# Altium PCB boardv1.PcbDoc
Units mil, origin at the board's own origin, x right, y up, seen from the top; angles counter-clockwise.
Board outline 3346.46 x 3346.46 mil, 4 copper layers (Top Layer, Mid-Layer 1, Mid-Layer 2, Bottom Layer); 186 components, 96 nets, 691 pads, 110 vias.
Unrouted connection lines stored in the file: 478.
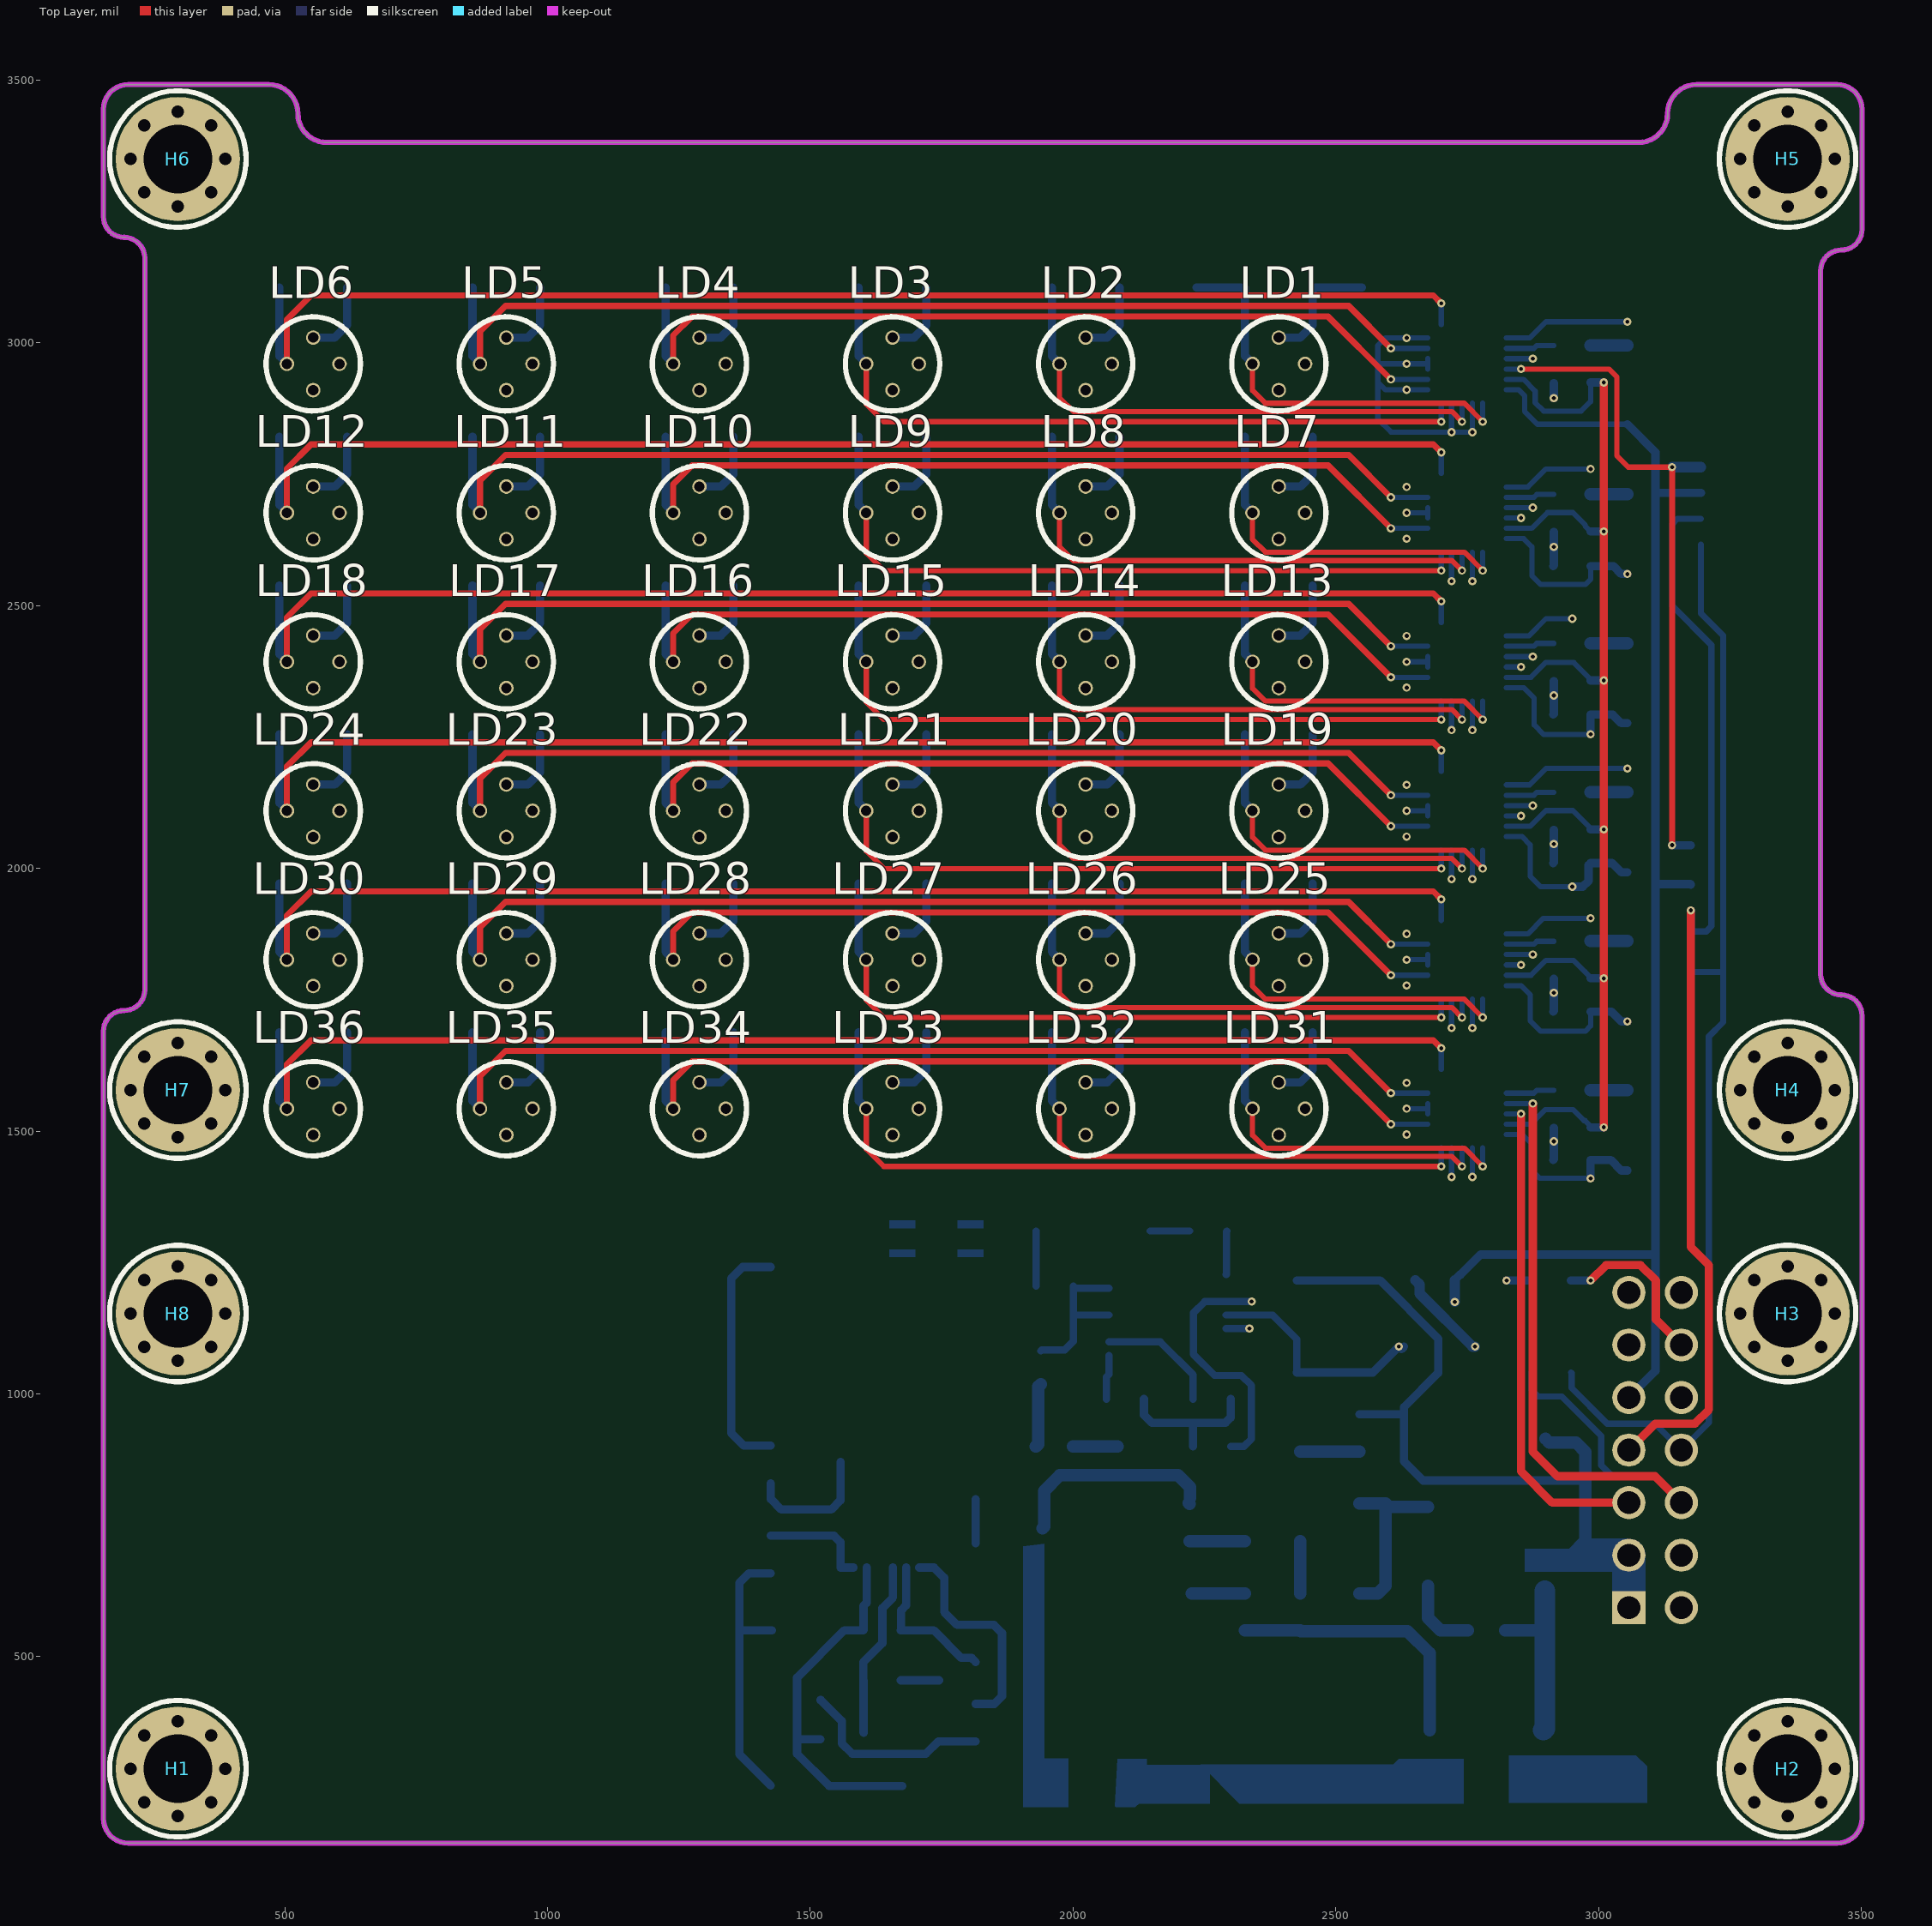
[diagram p0: Top Layer view]
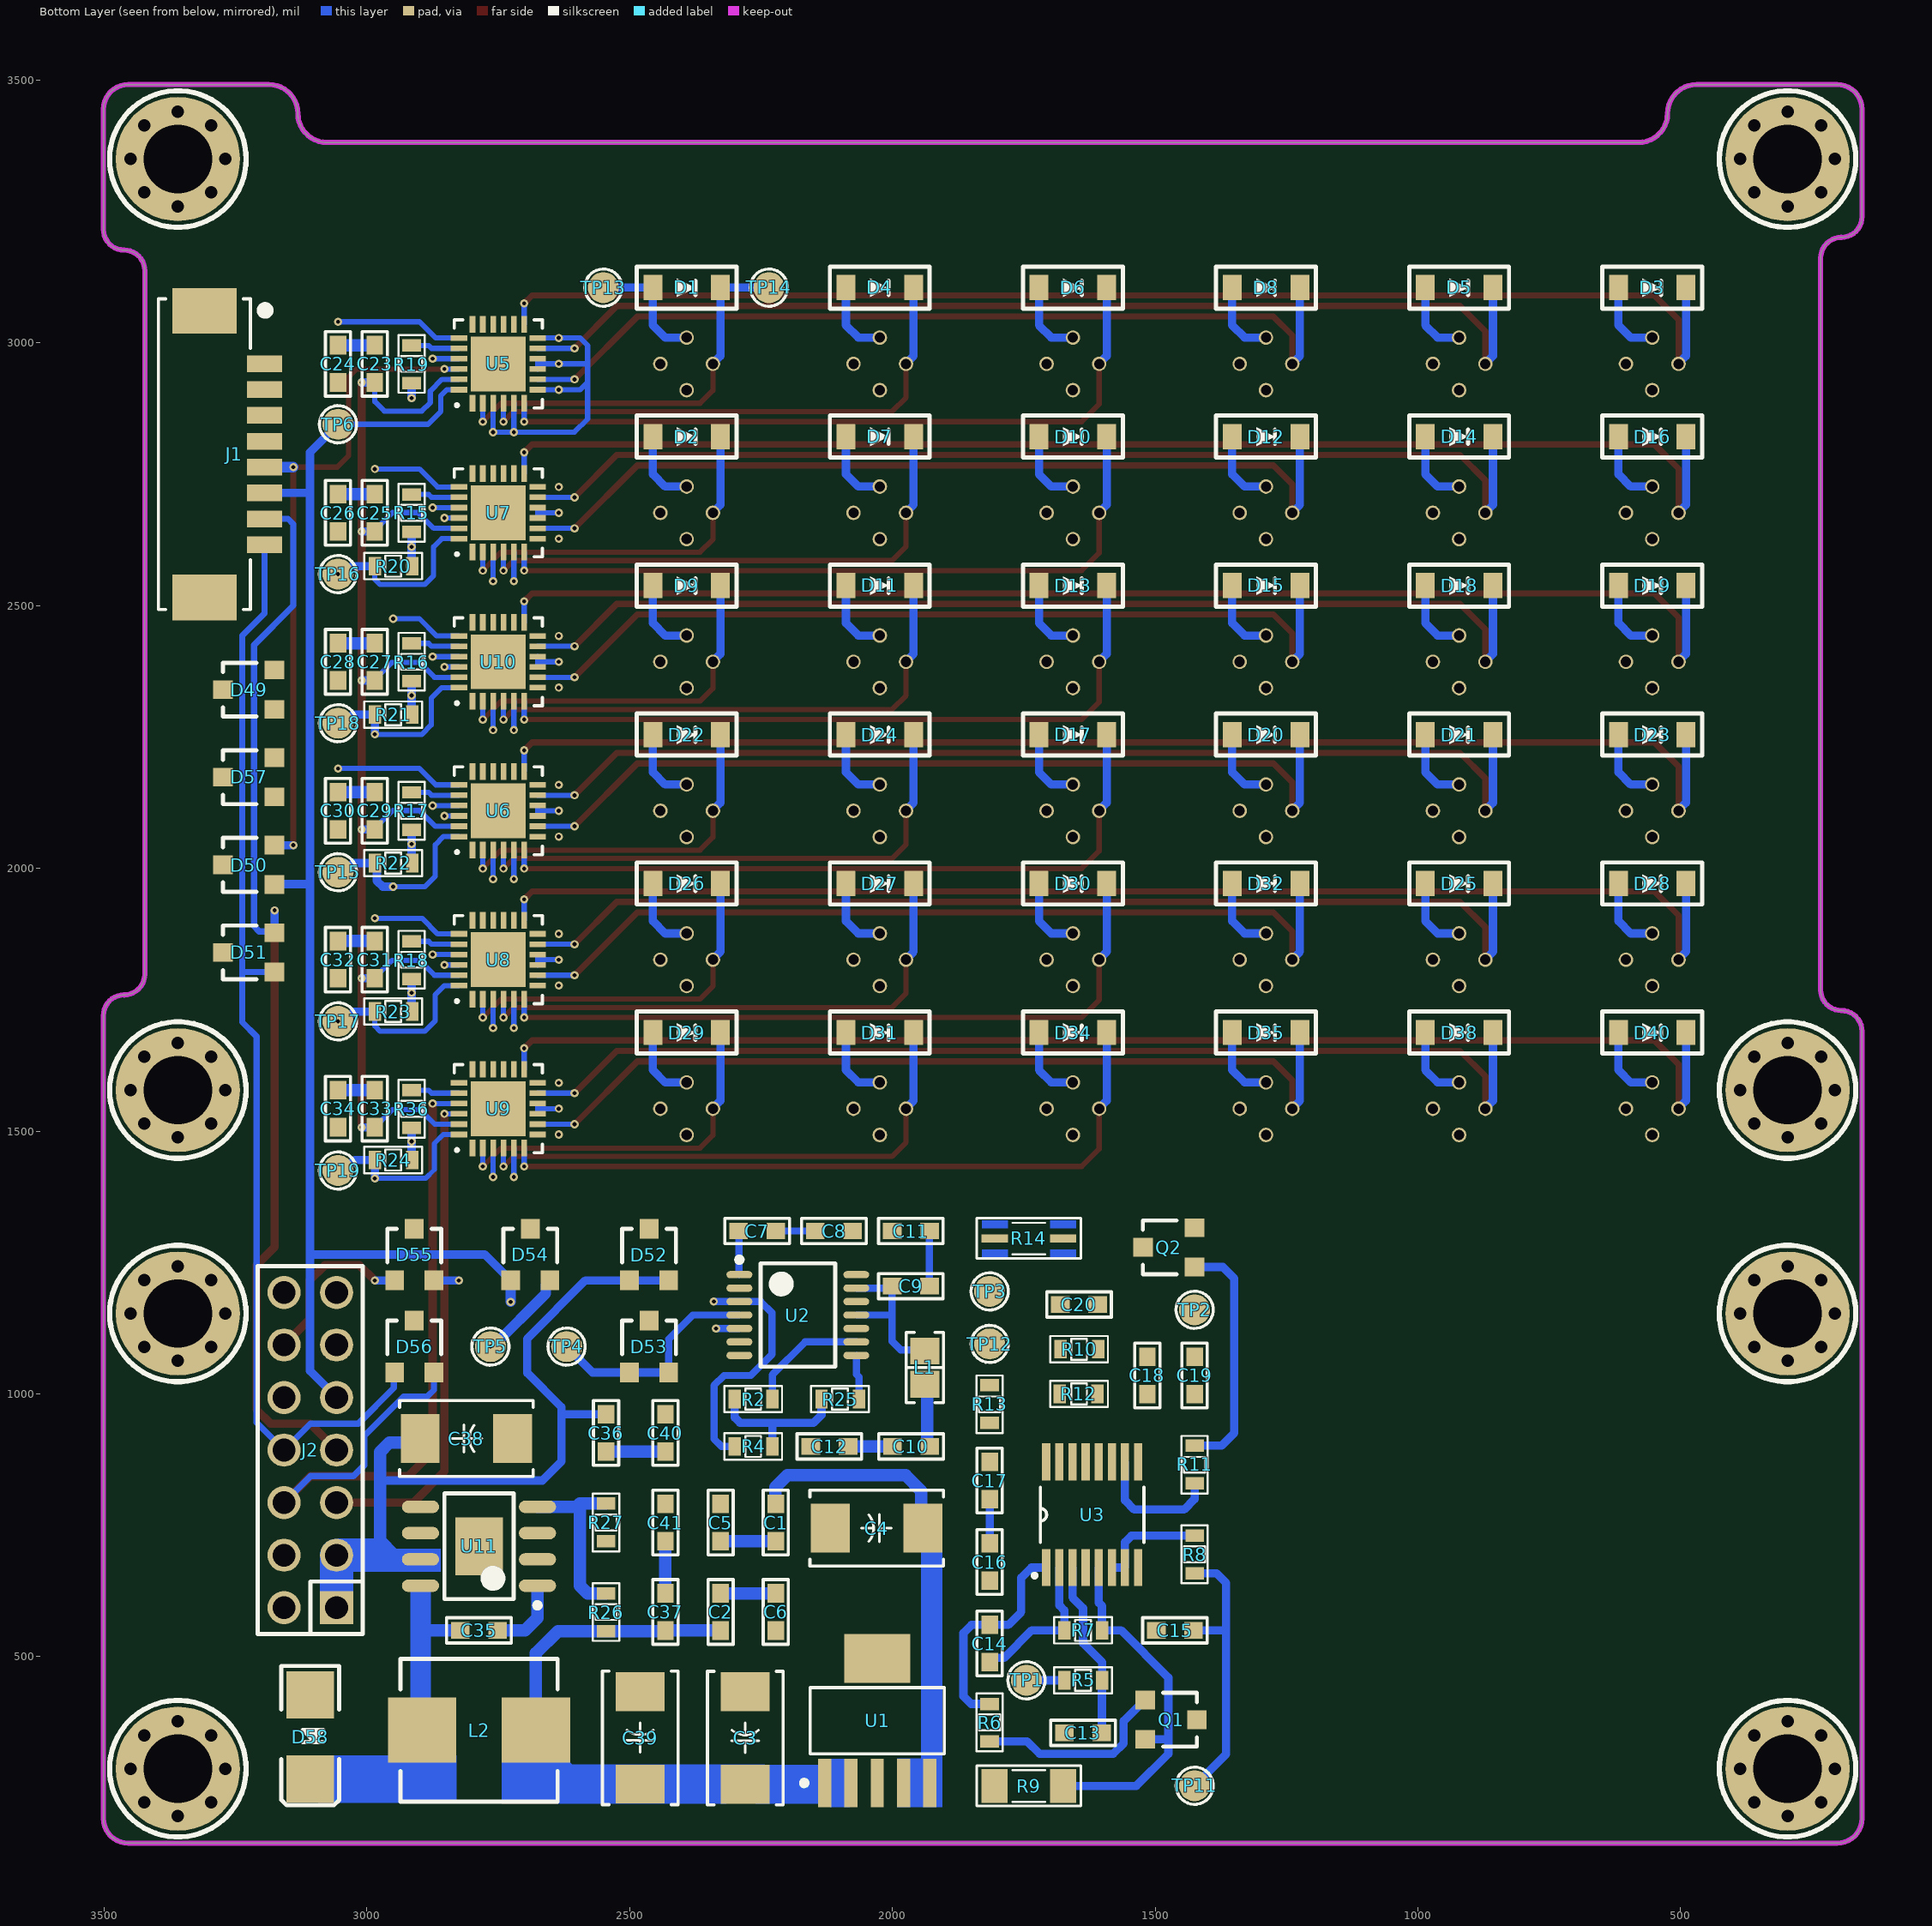
[diagram p1: Bottom Layer view, seen from below]
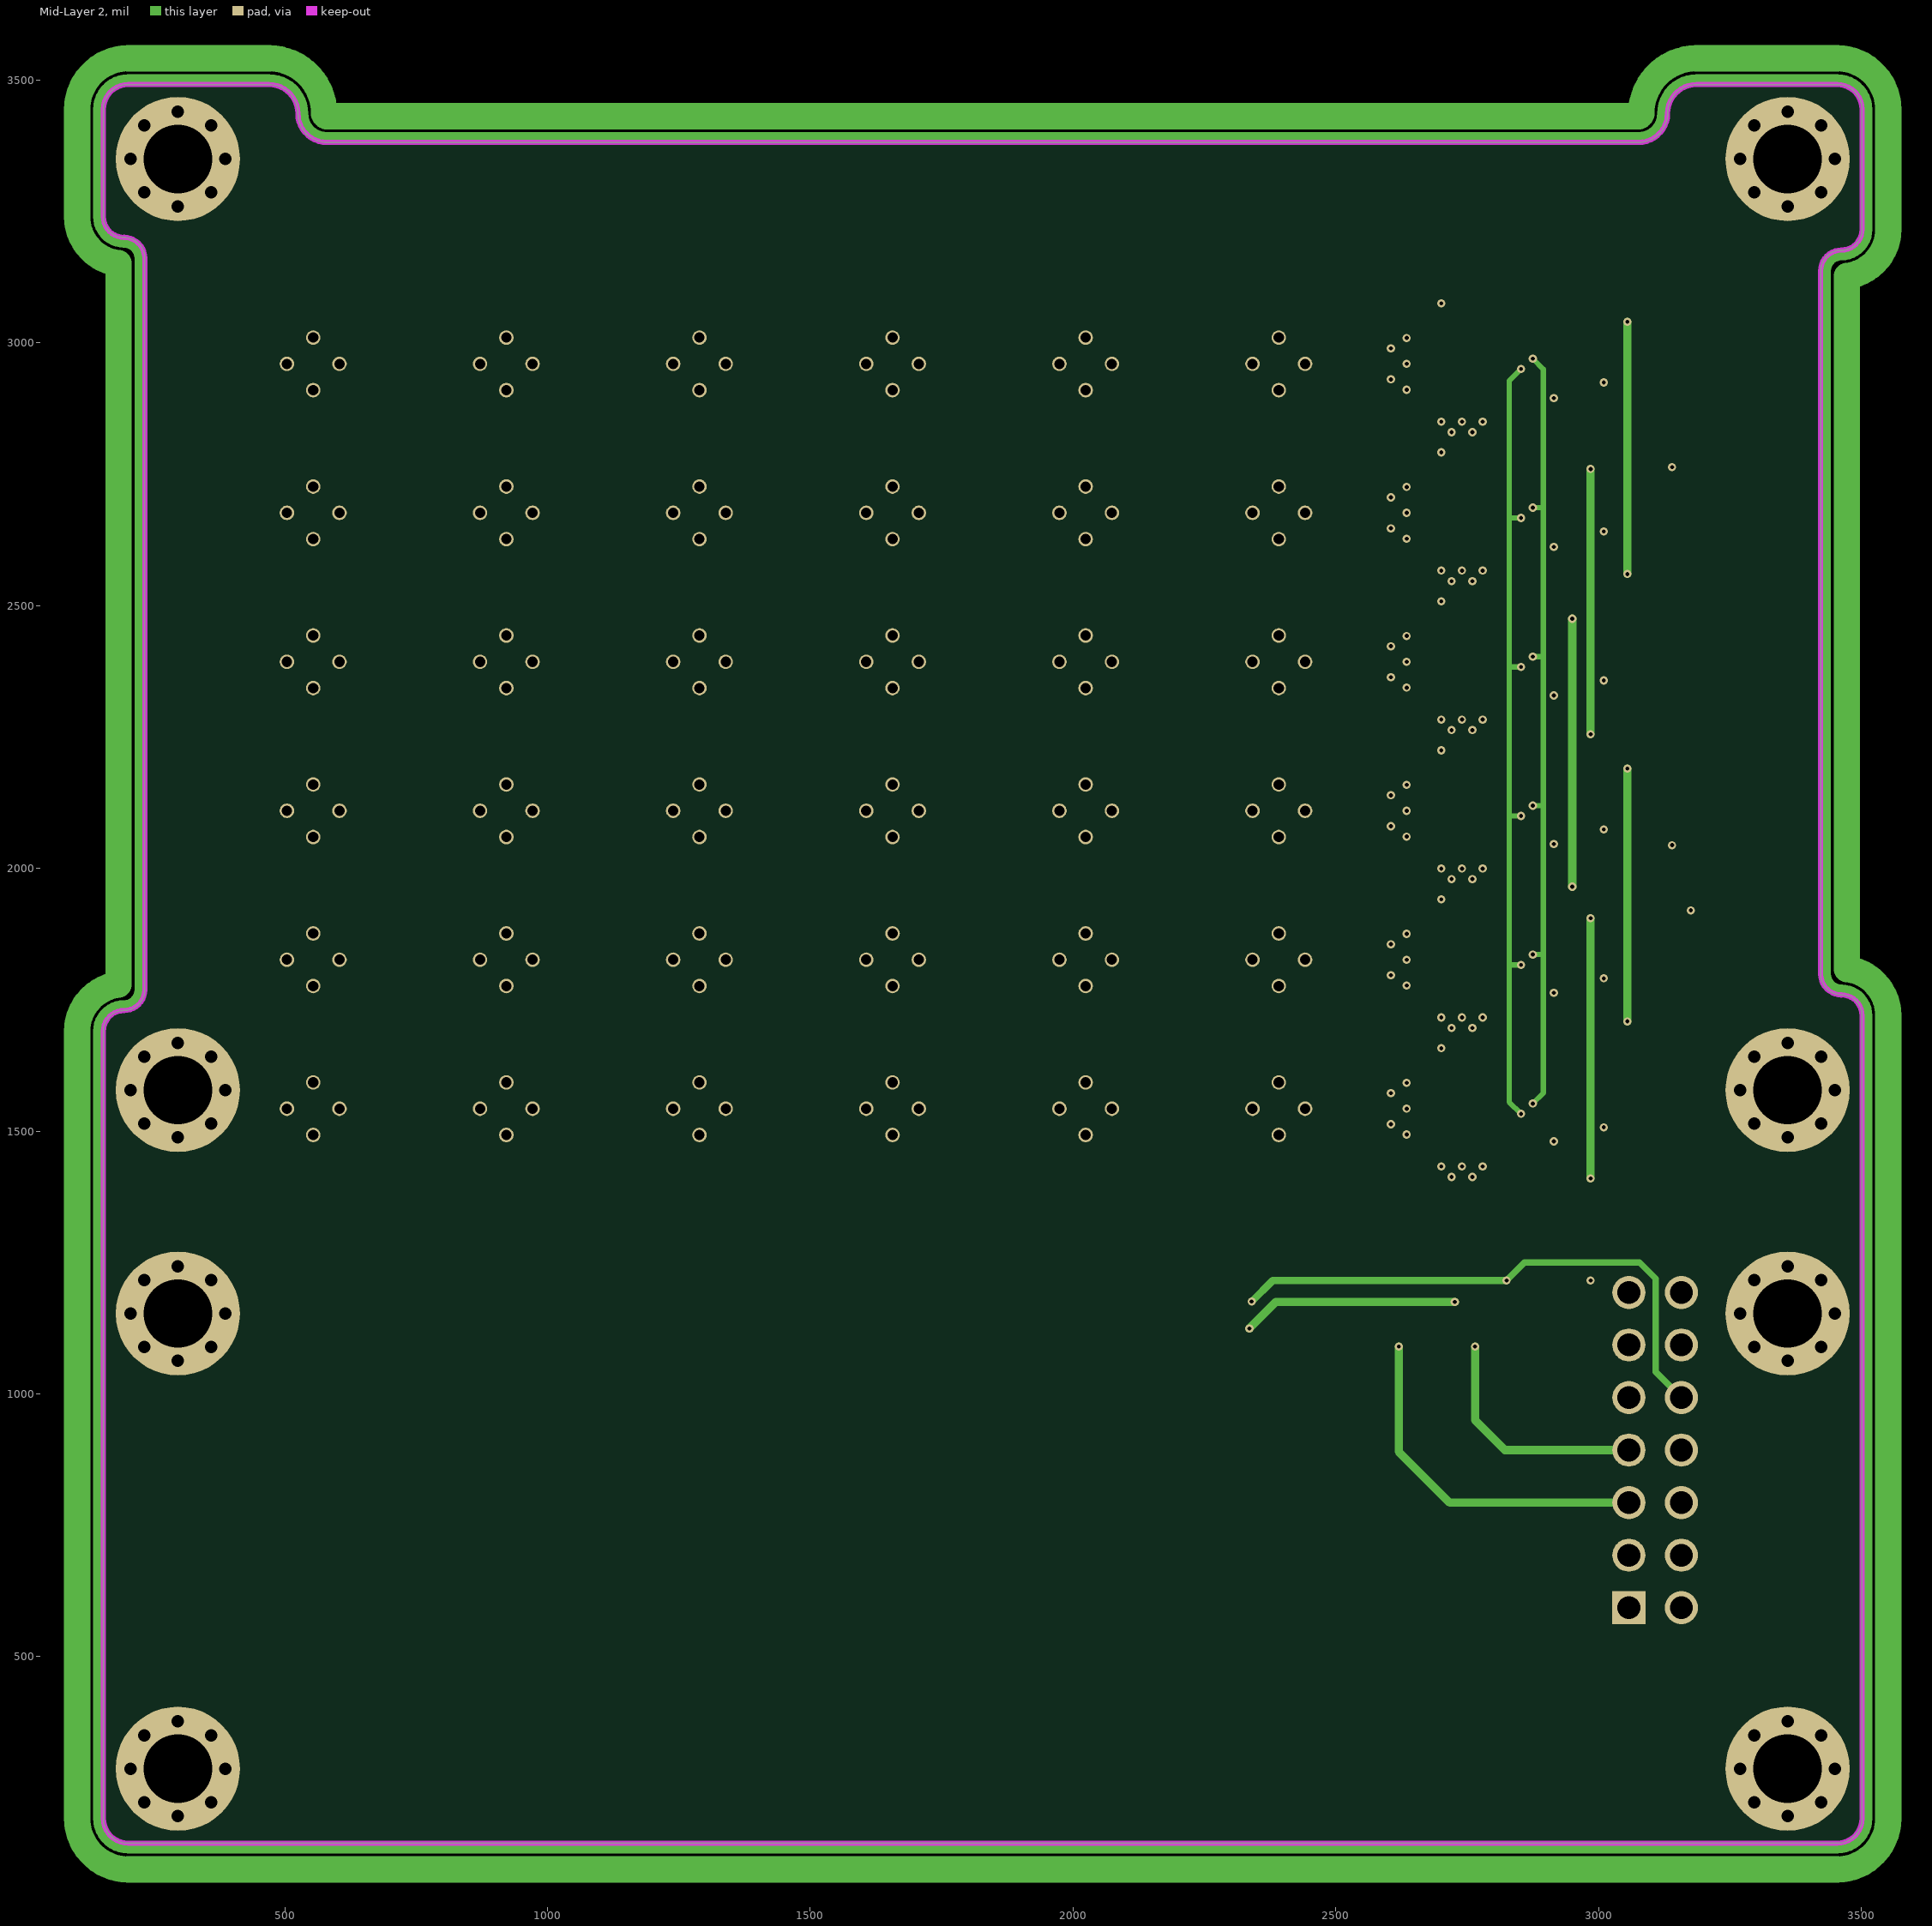
[diagram p2: Mid-Layer 2]

## Layer stack, top to bottom
Top Solder: solder mask 0.4, Solder Resist, Dk 3.5
Top Layer: signal copper 1.4
Dielectric 1: dielectric 12.6, FR-4, Dk 4.8
Mid-Layer 1: signal copper 1.4
Dielectric2: dielectric 12.6, FR-4, Dk 4.8
Mid-Layer 2: signal copper 1.4
Dielectric3: dielectric 12.6, FR-4, Dk 4.8
Bottom Layer: signal copper 1.4
Bottom Solder: solder mask 0.4, Solder Resist, Dk 3.5

## Board outline
202.24,145 cw(c202.24,192.24) 155,192.24 155,1690 cw(c194.37,1690) 194.37,1729.37 ccw(c194.37,1768.74) 233.74,1768.74 233.74,3161.26 ccw(c194.37,3161.26) 194.37,3200.63 cw(c194.37,3240) 155,3240 155,3444.21 cw(c202.24,3444.21) 202.24,3491.46 469.96,3491.46 cw(c469.96,3436.34) 525.08,3436.34 ccw(c580.2,3436.34) 580.2,3381.22 3076.26,3381.22 ccw(c3076.26,3436.34) 3131.38,3436.34 cw(c3186.5,3436.34) 3186.5,3491.46 3454.21,3491.46 cw(c3454.21,3444.21) 3501.46,3444.21 3501.46,3215.87 cw(c3462.09,3215.87) 3462.09,3176.5 ccw(c3462.09,3137.13) 3422.72,3137.13 3422.72,1798.54 ccw(c3462.09,1798.54) 3462.09,1759.17 cw(c3462.09,1719.8) 3501.46,1719.8 3501.46,192.24 cw(c3454.21,192.24) 3454.21,145

## Design rules (kind name [scope] priority, off if disabled: settings)
Clearance [All] p1: gap=0 ignorepadtopadclearanceinfootprint=FALSE
PolygonConnect [All] p1: connectstyle=Direct reliefconductorwidth=10 reliefentries=4 polygonreliefangle="90 Angle" airgapwidth=10
RoutingVias [All] p1: holewidth=28 width=50 viastyle="Through Hole" minholewidth=28 minwidth=50 maxholewidth=28 maxwidth=50
SolderMaskExpansion [All] p1: expansion=4 istentingtop=FALSE
Width [All] p1: maxlimit=118.11 minlimit=10 preferedwidth=23.62 minimp=50.000000 maximp=50.000000 favimp=50.000000
30 further rules are at their usual default settings.

## Classes and differential pairs
component class SWITCHING: C23 C24 C25 C26 C27 C28 C29 C30 C31 C32 C33 C34 D1 D2 D3 D4 D5 D6 D7 D8 D9 D10 D11 D12 D13 D14 D15 D16 D17 D18 D19 D20 D21 D22 D23 D24 D25 D26 D27 D28 D29 D30 D31 D32 D34 D35 D38 D40 LD1 LD2 LD3 LD4 LD5 LD6 LD7 LD8 LD9 LD10 LD11 LD12 LD13 LD14 LD15 LD16 LD17 LD18 LD19 LD20 LD21 LD22 LD23 LD24 LD25 LD26 LD27 LD28 LD29 LD30 LD31 LD32 LD33 LD34 LD35 LD36 R15 R16 R17 R18 R19 R20 R21 R22 R23 R24 R36 t TP13 TP14 TP15 TP16 TP17 TP18 TP19 U5 U6 U7 U8 U9 U10
component class CURRENT_SOURCE: C13 C14 C15 C16 C17 C18 C19 C20 Q1 Q2 R5 R6 R7 R8 R9 R10 R11 R12 R13 R14 TP11 TP12 U3
component class "POWER SWITCH AND LDO": C1 C2 C3 C4 C5 C6 C35 C36 C37 C38 C39 C40 C41 D58 L2 R26 R27 U1 U11
component class COMMUNICATION: C7 C8 C9 C10 C11 C12 D49 D50 D51 D52 D53 D54 D55 D56 D57 H1 H2 H3 H4 H5 H6 H7 H8 J1 J2 L1 R2 R4 R25 TP1 TP2 TP3 TP4 TP5 TP6 U2

## Components (designator, comment, footprint, x,y, rotation, side; value= is the part's Value field where it differs from the comment)
C1 "0.22uF/25V" SM-0603 2222,755 r90 bottom value=103
C2 "0.22uF/25V" SM-0603 2327,585 r270 bottom value=103
C3 "100uF/16V" "CAP TANT 2312" 2280,345 r90 bottom
C4 "100uF/16V" "CAP TANT 2312" 2030,744.5 r0 bottom
C5 "0.22uF/25V" SM-0603 2327,755 r270 bottom value=103
C6 "0.22uF/25V" SM-0603 2222,585 r90 bottom value=103
C7 "0.22uF/25V" SM-0603 2257.47,1309.91 r0 bottom value=103
C8 "0.22uF/25V" SM-0603 2111.24,1309.91 r0 bottom value=103
C9 "0.22uF/25V" SM-0603 1965,1205 r0 bottom value=103
C10 "0.22uF/25V" SM-0603 1964.57,900 r180 bottom value=103
C11 "0.22uF/25V" SM-0603 1965,1309.91 r180 bottom value=103
C12 "0.22uF/25V" SM-0603 2120,900 r180 bottom value=103
C13 "470pF/50V" SM-0603 1637.47,355 r180 bottom value=103
C14 "0.22uF/25V" SM-0603 1815,525 r90 bottom value=103
C15 "470pF/50V" SM-0603 1462.53,550 r180 bottom value=103
C16 "0.22uF/25V" SM-0603 1815,680 r270 bottom value=103
C17 "0.22uF/25V" SM-0603 1815,835 r270 bottom value=103
C18 "470pF/50V" SM-0603 1515,1035 r90 bottom value=103
C19 "0.22uF/25V" SM-0603 1425,1035 r270 bottom value=103
C20 "470pF/50V" SM-0603 1645,1170 r0 bottom value=103
C23 "0.22uF/25V" SM-0603 2985,2959.96 r270 bottom value=103
C24 "0.22uF/25V" SM-0603 3055,2959.96 r90 bottom value=103
C25 "0.22uF/25V" SM-0603 2985,2676.5 r270 bottom value=103
C26 "0.22uF/25V" SM-0603 3055,2676.5 r90 bottom value=103
C27 "0.22uF/25V" SM-0603 2985,2393.03 r270 bottom value=103
C28 "0.22uF/25V" SM-0603 3055,2393.03 r90 bottom value=103
C29 "0.22uF/25V" SM-0603 2985,2109.57 r270 bottom value=103
C30 "0.22uF/25V" SM-0603 3055,2109.57 r90 bottom value=103
C31 "0.22uF/25V" SM-0603 2985,1826.1 r270 bottom value=103
C32 "0.22uF/25V" SM-0603 3055,1826.1 r90 bottom value=103
C33 "0.22uF/25V" SM-0603 2985,1542.64 r270 bottom value=103
C34 "0.22uF/25V" SM-0603 3055,1542.64 r90 bottom value=103
C35 "0.01uF/25V" SM-0603 2786.73,550 r180 bottom value=103
C36 "0.22uF/25V" SM-0603 2545,925.5 r90 bottom value=103
C37 "0.22uF/25V" SM-0603 2432,585 r270 bottom value=103
C38 "100uF/16V" "CAP TANT 2312" 2810.72,915 r180 bottom
C39 "100uF/16V" "CAP TANT 2312" 2480,345.35 r90 bottom
C40 "0.22uF/25V" SM-0603 2432,925.5 r270 bottom value=103
C41 "0.22uF/25V" SM-0603 2432,755 r270 bottom value=103
D1 "1N4148W-TP" SOD23 2456.61,3105 r180 bottom value=1N5007
D2 "1N4148W-TP" SOD23 2456.61,2821.54 r180 bottom value=1N5007
D3 "1N4148W-TP" SOD23 619.21,3105 r180 bottom value=1N5007
D4 "1N4148W-TP" SOD23 2089.13,3105 r180 bottom value=1N5007
D5 "1N4148W-TP" SOD23 986.69,3105 r180 bottom value=1N5007
D6 "1N4148W-TP" SOD23 1721.65,3105 r180 bottom value=1N5007
D7 "1N4148W-TP" SOD23 2089.13,2821.54 r180 bottom value=1N5007
D8 "1N4148W-TP" SOD23 1354.17,3105 r180 bottom value=1N5007
D9 "1N4148W-TP" SOD23 2456.61,2538.07 r180 bottom value=1N5007
D10 "1N4148W-TP" SOD23 1721.65,2821.54 r180 bottom value=1N5007
D11 "1N4148W-TP" SOD23 2089.13,2538.07 r180 bottom value=1N5007
D12 "1N4148W-TP" SOD23 1354.17,2821.54 r180 bottom value=1N5007
D13 "1N4148W-TP" SOD23 1721.65,2538.07 r180 bottom value=1N5007
D14 "1N4148W-TP" SOD23 986.69,2821.54 r180 bottom value=1N5007
D15 "1N4148W-TP" SOD23 1354.17,2538.07 r180 bottom value=1N5007
D16 "1N4148W-TP" SOD23 619.21,2821.54 r180 bottom value=1N5007
D17 "1N4148W-TP" SOD23 1721.65,2254.61 r180 bottom value=1N5007
D18 "1N4148W-TP" SOD23 986.69,2538.07 r180 bottom value=1N5007
D19 "1N4148W-TP" SOD23 619.21,2538.07 r180 bottom value=1N5007
D20 "1N4148W-TP" SOD23 1354.17,2254.61 r180 bottom value=1N5007
D21 "1N4148W-TP" SOD23 986.69,2254.61 r180 bottom value=1N5007
D22 "1N4148W-TP" SOD23 2456.61,2254.61 r180 bottom value=1N5007
D23 "1N4148W-TP" SOD23 619.21,2254.61 r180 bottom value=1N5007
D24 "1N4148W-TP" SOD23 2089.13,2254.61 r180 bottom value=1N5007
D25 "1N4148W-TP" SOD23 986.69,1971.14 r180 bottom value=1N5007
D26 "1N4148W-TP" SOD23 2456.61,1971.14 r180 bottom value=1N5007
D27 "1N4148W-TP" SOD23 2089.13,1971.14 r180 bottom value=1N5007
D28 "1N4148W-TP" SOD23 619.21,1971.14 r180 bottom value=1N5007
D29 "1N4148W-TP" SOD23 2456.61,1687.68 r180 bottom value=1N5007
D30 "1N4148W-TP" SOD23 1721.65,1971.14 r180 bottom value=1N5007
D31 "1N4148W-TP" SOD23 2089.13,1687.68 r180 bottom value=1N5007
D32 "1N4148W-TP" SOD23 1354.17,1971.14 r180 bottom value=1N5007
D34 "1N4148W-TP" SOD23 1721.65,1687.68 r180 bottom value=1N5007
D35 "1N4148W-TP" SOD23 1354.17,1687.68 r180 bottom value=1N5007
D38 "1N4148W-TP" SOD23 986.69,1687.68 r180 bottom value=1N5007
D40 "1N4148W-TP" SOD23 619.21,1687.68 r180 bottom value=1N5007
D49 "S2312" SOT23-123 3225,2340 r90 bottom
D50 "S2303" SOT23-123 3225,2006.67 r90 bottom
D51 "S2303" SOT23-123 3225,1840 r90 bottom
D52 "S2312" SOT23-123 2463.11,1265 r180 bottom
D53 "S2303" SOT23-123 2463.11,1090 r180 bottom
D54 "S2303" SOT23-123 2689.06,1265 r180 bottom
D55 "S2303" SOT23-123 2910,1265 r180 bottom
D56 "S2303" SOT23-123 2910,1090 r180 bottom
D57 "S2303" SOT23-123 3225,2173.33 r90 bottom
D58 "SS54" DIO-SMD-A 3102.76,352.28 r90 bottom value=1N5007
H1 "HOLD" M3 296.73,286.73 r0 top locked
H2 "HOLD" M3 3359.72,286.73 r0 top locked
H3 "HOLD" M3 3359.72,1152.87 r0 top locked
H4 "HOLD" M3 3359.72,1578.07 r0 top locked
H5 "HOLD" M3 3359.72,3349.72 r0 top locked
H6 "HOLD" M3 296.73,3349.72 r0 top locked
H7 "HOLD" M3 296.73,1578.07 r0 top locked
H8 "HOLD" M3 296.73,1152.87 r0 top locked
J1 "LASER EXT" 0532610871 3309.35,2788.03 r90 bottom
J2 "JP7x2" JP7-D2T 3107.76,893.03 r90 bottom
L1 "10uH" "FER 0805/2012" 1938.45,1050 r270 bottom value=1.5uH
L2 "15uH/3.5A" SRP7050TA 2786.73,360 r180 bottom
LD1 "LaserDiode" LASER_SOCKET 2391.61,2959.96 r0 top
LD2 "LaserDiode" LASER_SOCKET 2024.13,2959.96 r0 top
LD3 "LaserDiode" LASER_SOCKET 1656.65,2959.96 r0 top
LD4 "LaserDiode" LASER_SOCKET 1289.17,2959.96 r0 top
LD5 "LaserDiode" LASER_SOCKET 921.69,2959.96 r0 top
LD6 "LaserDiode" LASER_SOCKET 554.21,2959.96 r0 top
LD7 "LaserDiode" LASER_SOCKET 2391.61,2676.5 r0 top
LD8 "LaserDiode" LASER_SOCKET 2024.13,2676.5 r0 top
LD9 "LaserDiode" LASER_SOCKET 1656.65,2676.5 r0 top
LD10 "LaserDiode" LASER_SOCKET 1289.17,2676.5 r0 top
LD11 "LaserDiode" LASER_SOCKET 921.69,2676.5 r0 top
LD12 "LaserDiode" LASER_SOCKET 554.21,2676.5 r0 top
LD13 "LaserDiode" LASER_SOCKET 2391.61,2393.03 r0 top
LD14 "LaserDiode" LASER_SOCKET 2024.13,2393.03 r0 top
LD15 "LaserDiode" LASER_SOCKET 1656.65,2393.03 r0 top
LD16 "LaserDiode" LASER_SOCKET 1289.17,2393.03 r0 top
LD17 "LaserDiode" LASER_SOCKET 921.69,2393.03 r0 top
LD18 "LaserDiode" LASER_SOCKET 554.21,2393.03 r0 top
LD19 "LaserDiode" LASER_SOCKET 2391.61,2109.57 r0 top
LD20 "LaserDiode" LASER_SOCKET 2024.13,2109.57 r0 top
LD21 "LaserDiode" LASER_SOCKET 1656.65,2109.57 r0 top
LD22 "LaserDiode" LASER_SOCKET 1289.17,2109.57 r0 top
LD23 "LaserDiode" LASER_SOCKET 921.69,2109.57 r0 top
LD24 "LaserDiode" LASER_SOCKET 554.21,2109.57 r0 top
LD25 "LaserDiode" LASER_SOCKET 2391.61,1826.1 r0 top
LD26 "LaserDiode" LASER_SOCKET 2024.13,1826.1 r0 top
LD27 "LaserDiode" LASER_SOCKET 1656.65,1826.1 r0 top
LD28 "LaserDiode" LASER_SOCKET 1289.17,1826.1 r0 top
LD29 "LaserDiode" LASER_SOCKET 921.69,1826.1 r0 top
LD30 "LaserDiode" LASER_SOCKET 554.21,1826.1 r0 top
LD31 "LaserDiode" LASER_SOCKET 2391.61,1542.64 r0 top
LD32 "LaserDiode" LASER_SOCKET 2024.13,1542.64 r0 top
LD33 "LaserDiode" LASER_SOCKET 1656.65,1542.64 r0 top
LD34 "LaserDiode" LASER_SOCKET 1289.17,1542.64 r0 top
LD35 "LaserDiode" LASER_SOCKET 921.69,1542.64 r0 top
LD36 "LaserDiode" LASER_SOCKET 554.21,1542.64 r0 top
Q1 "AO3400" SOT23-132 1469.94,380 r270 bottom
Q2 "AO3400" SOT23-132 1474.21,1278.8 r90 bottom
R2 "4.7K 1%" RES-SMD-0603 2265,990 r180 bottom
R4 "4.7K 1%" RES-SMD-0603 2265,900 r180 bottom
R5 "50R 1%" RES-SMD-0603 1637.47,455 r180 bottom
R6 "100R 1%" RES-SMD-0603 1815.03,375 r270 bottom
R7 "1K 1%" RES-SMD-0603 1637.47,550 r180 bottom
R8 "50R 1%" RES-SMD-0603 1425,695 r270 bottom
R9 "250R 1%" RES-SMD-1206#1 1740.5,253.84 r180 bottom
R10 "50R 1%" RES-SMD-0603 1645,1085 r180 bottom
R11 "100R 1%" RES-SMD-0603 1425,865 r90 bottom
R12 "1K 1%" RES-SMD-0603 1645.01,1000 r0 bottom
R13 "50R 1%" RES-SMD-0603 1815,980 r90 bottom
R14 "250R 1%" RES-SMD-1206#2 1740.47,1295.41 r180 bottom
R15 "4.7K 1%" RES-SMD-0603 2915,2676.5 r270 bottom
R16 "4.7K 1%" RES-SMD-0603 2915,2393.03 r270 bottom
R17 "4.7K 1%" RES-SMD-0603 2915,2109.57 r270 bottom
R18 "4.7K 1%" RES-SMD-0603 2915,1826.11 r270 bottom
R19 "4.7K 1%" RES-SMD-0603 2915,2959.96 r270 bottom
R20 "4.7K 1%" RES-SMD-0603 2950,2575 r180 bottom
R21 "4.7K 1%" RES-SMD-0603 2950,2292.5 r180 bottom
R22 "4.7K 1%" RES-SMD-0603 2950,2010 r180 bottom
R23 "4.7K 1%" RES-SMD-0603 2950,1727.5 r180 bottom
R24 "4.7K 1%" RES-SMD-0603 2950,1445 r180 bottom
R25 "4.7K 1%" RES-SMD-0603 2100,990 r180 bottom
R26 "10K 1%" RES-SMD-0603 2545,585 r270 bottom
R27 "3.24K 0.1%" RES-SMD-0603 2545,755 r90 bottom
R36 "4.7K 1%" RES-SMD-0603 2915,1542.64 r270 bottom
TP1 "Test_Point" TESTPOINT 1745,455 r180 bottom
TP2 "Test_Point" TESTPOINT 1425,1160 r90 bottom
TP3 "Test_Point" TESTPOINT 1815,1195 r90 bottom
TP4 "Test_Point" TESTPOINT 2620,1090 r90 bottom
TP5 "Test_Point" TESTPOINT 2765,1090 r90 bottom
TP6 "Test_Point" TESTPOINT 3055,2845 r90 bottom
TP11 "Test_Point" TESTPOINT 1425,254.35 r0 bottom
TP12 "Test_Point" TESTPOINT 1815,1095 r90 bottom
TP13 "Test_Point" TESTPOINT 2550,3105 r90 bottom
TP14 "Test_Point" TESTPOINT 2235,3105 r90 bottom
TP15 "Test_Point" TESTPOINT 3055,1992.5 r90 bottom
TP16 "Test_Point" TESTPOINT 3055,2560 r90 bottom
TP17 "Test_Point" TESTPOINT 3055,1708.75 r90 bottom
TP18 "Test_Point" TESTPOINT 3055,2276.25 r180 bottom
TP19 "Test_Point" TESTPOINT 3055,1425 r180 bottom
U1 "TPS7A4533DCQR" SOT223-6 2028.91,378.04 r90 bottom
U2 "MCP4902-E/ST" TSSOP14 2180,1150 r180 bottom
U3 "OPA4340" SSOP16 1620,770 r90 bottom
U5 "ADG1414BCPZ" ADG1414BCPZ 2750,2959.96 r90 bottom
U6 "ADG1414BCPZ" ADG1414BCPZ 2750,2109.57 r90 bottom
U7 "ADG1414BCPZ" ADG1414BCPZ 2750,2676.5 r90 bottom
U8 "ADG1414BCPZ" ADG1414BCPZ 2750,1826.1 r90 bottom
U9 "ADG1414BCPZ" ADG1414BCPZ 2750,1542.64 r90 bottom
U10 "ADG1414BCPZ" ADG1414BCPZ 2750,2393.03 r90 bottom
U11 "TPS5430DDAR" HSOP8 2786.73,710 r0 bottom

## Footprints (in the part's own frame and the unit in brackets; to place one, negate y for a bottom-side part, rotate by r counter-clockwise, add the part's x,y. Pads: shape width x height; smd on the part's side, far side on the other; paste and mask are expansions set on the pad)
0532610871 [mil] "CONN HEADER SMD R/A 8POS 1.25MM"
  rect 32x67 smd paste+0 mask+0: 1(172.24,-114.35) 2(123.03,-114.35) 3(73.82,-114.35) 4(24.61,-114.35) 5(-24.61,-114.35) 6(-73.82,-114.35) 7(-123.03,-114.35) 8(-172.24,-114.35)
  rect 87x122 smd paste-61 mask-61: 9(-272.64,-0.18) 10(272.64,-0.18)
  silkscreen extent -296,-122 296,88, body extent -299,-123 298,81, height 134
ADG1414BCPZ [mm] "IC SW SPST-NOX8 11.5OHM 24LFCSP"
  rect 0.805x0.275 smd paste+0 mask+0: 1(-1.902,1.25) 2(-1.902,0.75) 3(-1.902,0.25) 4(-1.902,-0.25) 5(-1.902,-0.75) 6(-1.902,-1.25) 13(1.902,-1.25) 14(1.902,-0.75) 15(1.902,-0.25) 16(1.902,0.25) 17(1.902,0.75) 18(1.902,1.25)
  rect 0.275x0.805 smd paste+0 mask+0: 7(-1.25,-1.902) 8(-0.75,-1.902) 9(-0.25,-1.902) 10(0.25,-1.902) 11(0.75,-1.902) 12(1.25,-1.902) 19(1.25,1.902) 20(0.75,1.902) 21(0.25,1.902) 22(-0.25,1.902) 23(-0.75,1.902) 24(-1.25,1.902)
  rect 2.65x2.65 smd paste+0 mask+0: HTAB(0,0)
  silkscreen extent -2.13,-2.13 2.13,2.13, body extent -2,-2 2,2, height 0.6
"CAP TANT 2312" [mil]
  rect 74x93 smd paste+0 mask+0: 1(-88,0) 2(88,0)
  silkscreen extent -127,-72 127,72, body extent -118,-63 118,63, height 110
DIO-SMD-A [mil]
  rect 90x90.55 smd: 1(75,5) 2(-85,5)
  silkscreen extent -135,-50 130,60, body extent -104,-45 101,57, height 95
"FER 0805/2012" [mm] "Chip Ferrite, 2-Leads, Body 2.00x1.20mm, IPC Medium Density"
  rect 1.3x1.4 smd: 1(-0.8,0) 2(0.8,0)
  silkscreen extent -1.7,-0.9 1.7,0.9, body extent -1,-0.64 1,0.64, height 1.26
HSOP8 [mm] "SOIC, 8-Leads, Body 4.9x3.9mm, Pitch 1.27mm, IPC High Density"
  oval 1.8x0.6 smd: 1(-2.825,1.905) 2(-2.825,0.635) 3(-2.825,-0.635) 4(-2.825,-1.905) 5(2.825,-1.905) 6(2.825,-0.635) 7(2.825,0.635) 8(2.825,1.905)
  rect 2.3x2.8 smd: 9(0,0)
  silkscreen extent -2.95,-2.55 1.68,2.98, body extent -2.99,-2.45 3,2.45, height 1.6
JP7-D2T [mm] "14 pins, dual pin, straight, gold plating"
  rect 1.6x1.6 hole 1.1: 1(-7.62,-1.27)
  round 1.6 hole 1.1: 2(-5.08,-1.27) 3(-2.54,-1.27) 4(0,-1.27) 5(2.54,-1.27) 6(5.08,-1.27) 7(7.62,-1.27) 8(7.62,1.27) 9(5.08,1.27) 10(2.54,1.27) 11(0,1.27) 12(-2.54,1.27) 13(-5.08,1.27) 14(-7.62,1.27)
  silkscreen extent -8.89,-2.54 8.89,2.54, body extent -8.89,-2.54 8.89,2.54, height 8.55
LASER_SOCKET [mm]
  round 0.7 hole 0.5: 1(-1.27,0) 2(0,-1.27) 3(0,1.27) 4(1.27,0)
  silkscreen extent -2.28,-2.28 2.28,2.28, body extent -1.75,-1.75 1.75,1.75, height 7.62
M3 [mm]
  round 1.2 hole 0.6: 1(-2.286,0) 1(-1.616,-1.616) 1(-1.616,1.616) 1(0,-2.286) 1(0,2.286) 1(1.616,-1.616) 1(1.616,1.616) 1(2.286,0)
  round 6 hole 3.3: 1(0,0)
  silkscreen extent -3.3,-3.3 3.3,3.3
RES-SMD-0603 [mm]
  rect 0.6x0.9 smd: 1(-0.889,0) 2(0.927,0)
  silkscreen extent -1.4,-0.64 1.4,0.64, body extent -0.8,-0.4 0.8,0.4, height 0.43
RES-SMD-1206#1 [mil]
  rect 50x65 smd: 1(-65,0) 2(65,0)
  silkscreen extent -99,-38 99,39, body extent -63,-31 63,32, height 40
RES-SMD-1206#2 [mil]
  rect 50x15.75 smd: 1(-65,0) 2(65,0)
  silkscreen extent -99,-38 99,39, body extent -63,-31 63,32, height 40
SM-0603 [mm]
  rect 0.9x0.8 smd: 1(-0.9,0) 2(0.9,0)
  silkscreen extent -1.56,-0.61 1.56,0.61, body extent -0.81,-0.4 0.79,0.4, height 0.5
SOD23 [mm]
  rect 0.91x1.22 smd: 1(0.016,0) 2(3.286,0)
  silkscreen extent -0.76,-1.02 4.06,1.02, body extent -0.22,-0.85 3.53,0.85, height 1.2
SOT23-123 [mm] "SOT23, 1=bottom-left, 2=top, 3=bottom-right"
  rect 0.9x0.95 smd: 1(-0.95,-1.25) 2(0,1.25)
  rect 0.9x0.95 smd mask+0: 3(0.95,-1.25)
  silkscreen extent -1.3,-0.38 1.3,1.25, body extent -1.52,-1.23 1.48,1.27, height 1.06
SOT23-132 [mm]
  rect 0.9x0.95 smd: 1(-0.95,-1.25) 3(0,1.25)
  rect 0.9x0.95 smd mask+0: 2(0.95,-1.25)
  silkscreen extent -1.3,-0.38 1.3,1.25, body extent -1.52,-1.23 1.48,1.27, height 1.06
SOT223-6 [mil]
  rect 92.34x24.9 smd paste+0 mask+0: 1(-118.52,100) 2(-118.52,50) 3(-118.52,0) 4(-118.52,-50) 5(-118.52,-100)
  rect 92.34x124.9 smd paste+0 mask+0: 6(118.52,0)
  silkscreen extent -123,-128 63,144, body extent -140,-128 140,128, height 65
SRP7050TA [mm] "Precision Wire Wound Inductor, 2-Leads, Body 7.30x6.60mm, IPC Medium Density"
  rect 3.3x3.15 smd: 1(-2.75,0) 2(2.75,0)
  silkscreen extent -3.8,-3.45 3.8,3.45, body extent -3.6,-3.3 3.6,3.3, height 4.91
SSOP16 [mil]
  rect 70.87x15.75 smd paste-35.5: 1(-100.5,87.5) 2(-100.5,62.5) 3(-100.5,37.5) 4(-100.5,12.5) 5(-100.5,-12.5) 6(-100.5,-37.5) 7(-100.5,-62.5) 8(-100.5,-87.5) 9(100.5,-87.5) 10(100.5,-62.5) 11(100.5,-37.5) 12(100.5,-12.5) 13(100.5,12.5) 14(100.5,37.5) 15(100.5,62.5) 16(100.5,87.5)
  silkscreen extent -118,-98 53,112, body extent -118,-97 118,97, height 69
TESTPOINT [mm]
  round 1.5 smd: 1(0,0)
  silkscreen extent -0.9,-0.9 0.9,0.9
TSSOP14 [mm] "TSSOP, 14-Leads, Body 5.00x4.40mm, Pitch 0.65mm, IPC High Density"
  oval 1.25x0.35 smd: 1(-2.825,1.95) 2(-2.825,1.3) 3(-2.825,0.65) 4(-2.825,0) 5(-2.825,-0.65) 6(-2.825,-1.3) 7(-2.825,-1.95) 8(2.825,-1.95) 9(2.825,-1.3) 10(2.825,-0.65) 11(2.825,0) 12(2.825,0.65) 13(2.825,1.3) 14(2.825,1.95)
  silkscreen extent -2.95,-2.5 1.8,2.8, body extent -3.23,-2.55 3.23,2.55, height 1.25

## Part data
C1 C2 C5 C6 C7 C8 C9 C10 C11 C12 C13 C14 C15 C16 C17 C18 C19 C20 C23 C24 C25 C26 C27 C28 C29 C30 C31 C32 C33 C34 C35 C36 C37 C40 C41: library part CM, "0603"
C3 C4 C38 C39: library part CN-ALU-SMD, "Polarized Capacitor (Axial)", LatestRevisionDate=17-Jul-2002, LatestRevisionNote="Re-released for DXP Platform.", PackageReference=POLAR0.8, Published=8-Jun-2000, Publisher="Altium Limited"
D1 D2 D3 D4 D5 D6 D7 D8 D9 D10 D11 D12 D13 D14 D15 D16 D17 D18 D19 D20 D21 D22 D23 D24 D25 D26 D27 D28 D29 D30 D31 D32 D34 D35 D38 D40: library part "Diode SMD", "DIODE GEN PURP 100V 150MA SOD123", Code - JEDEC=DO-214-AB, Published=8-Jun-2000, Publisher="Altium Limited", Revision="July-2002: Re-released for DXP Platform."
D49 D52: library part S2315, "TVS DIODE 12VWM 19VC SOT23, P/N:  S2312"
D50 D51 D53 D54 D55 D56 D57: "TVS DIODE 3.3VWM 8VC SOT23, P/N:   / S2303"
D58: library part "Diode SMD", "DIODE SCHOTTKY 40V 5A SMA", Code - JEDEC=DO-214-AB, Published=8-Jun-2000, Publisher="Altium Limited", Revision="July-2002: Re-released for DXP Platform."
H1 H2 H3 H4 H5 H6 H7 H8: library part PAD_HOLD
J1: library part JP8, "WR-PHD 2.54 mm Angled Socket Header", Manufacturer="W¨¹rth Elektronik eiSos GmbH", partNo=613008143121, ComponentLink1 Description=Manufacturer, ComponentLink1URL=http://www.we-online.com, ComponentLink2 Description=Datasheet, ComponentLink2URL=http://katalog.we-online.de/em/datasheet/6130xx143121.pdf, Created by="Karrer Zheng", Created Date="29 March 2013", NoPins=08
J2: "WR-PHD 2.54 mm Dual Socket Header", Manufacturer="W¨¹rth Elektronik eiSos GmbH", partNo=61301421821, ComponentLink1 Description=Manufacturer, ComponentLink1URL=http://www.we-online.com, ComponentLink2 Description=Datasheet, ComponentLink2URL=http://katalog.we-online.de/em/datasheet/6130xx21821.pdf, Created by="Karrer Zheng", Created Date="29 March 2013", NoPins=14
L1: library part Inductor, "MLZ1608N100LT000"
L2: library part INDUCTOR, "SRP7050TA-150M"
LD1 LD2 LD3 LD4 LD5 LD6 LD7 LD8 LD9 LD10 LD11 LD12 LD13 LD14 LD15 LD16 LD17 LD18 LD19 LD20 LD21 LD22 LD23 LD24 LD25 LD26 LD27 LD28 LD29 LD30 LD31 LD32 LD33 LD34 LD35 LD36: library part LD
Q1 Q2: library part FET-N
R2 R4 R5 R6 R7 R8 R10 R11 R12 R13 R14 R15 R16 R17 R18 R19 R20 R21 R22 R23 R24 R25 R26 R36: library part Res-SMD, "0603", Manufacturer="Generic Components", Class=Passive, Published=08/06/2000, Publisher="Altium Hobart Technology Centre"
R9: library part Res-SMD, "1206", Manufacturer="Generic Components", Class=Passive, Published=08/06/2000, Publisher="Altium Hobart Technology Centre"
R27: library part Res-SMD, "ERA-3AEB3241V", Manufacturer="Generic Components", Class=Passive, Published=08/06/2000, Publisher="Altium Hobart Technology Centre"
U1: "IC REG LINEAR 3.3V 1.5A SOT223-6"
U2: library part MCP4902, "IC DAC 8BIT V-OUT 14TSSOP"
U3: "IC CMOS 4 CIRCUIT 16SSOP", Supplier Part Number 1=595-OPA4340UA/2K5, Supplier 1=Mouser
U5 U6 U7 U8 U9 U10: library part ADG1414, "IC SW SPST-NOX8 11.5OHM 24LFCSP"
U11: library part TPS543X, "8SOP"

## Via types
v1: diameter 15.75, hole 7.87, Top Layer to Bottom Layer, 110 vias

## Nets (pads, with @x,y where several pads share a name; then routed paths per layer and width w, separated by ;. In a path a pad name is that pad's centre, name@x,y a point inside that pad or via, vN(x,y) a via of type N, cw(c..) or ccw(c..) an arc to the next point about the centre after c; other vN are vias at no path point)
12V_EXP: C23.2 C25.2 C27.2 C29.2 C31.2 C33.2 C36.2 C38.1 D49.1 D49.3 D52.1 D52.3 J1.1 J2.1 J2.2 U5.3 U5.5 U5.7 U5.9 U5.10 U5.12 U5.23 U6.3 U6.5 U6.7 U6.9 U6.10 U6.12 U6.23 U7.3 U7.5 U7.7 U7.9 U7.10 U7.12 U7.23 U8.3 U8.5 U8.7 U8.9 U8.10 U8.12 U8.23 U9.3 U9.5 U9.7 U9.9 U9.10 U9.12 U9.23 U10.3 U10.5 U10.7 U10.9 U10.10 U10.12 U10.23 U11.7 | length 5761.4
  Top Layer w15.75: v1(3010,1507.2) v1(3010,1790.67) v1(3010,2074.13) v1(3010,2357.6) v1(3010,2641.06) v1(3010,2924.53)
  Bottom Layer w10: v1(2635,1542.64) 2675.1,1542.64 ; v1(2635,1826.1) 2675.1,1826.1 ; v1(2635,2109.57) 2675.1,2109.57 ; v1(2635,2393.03) 2675.1,2393.03 ; v1(2635,2676.5) 2675.1,2676.5 ; U9.9 2675.1,1542.64 ; U9.10 2675.1,1542.64 ; U8.9 2675.1,1826.1 ; U8.10 2675.1,1826.1 ; U6.9 2675.1,2109.57 ; U6.10 2675.1,2109.57 ; U10.9 2675.1,2393.03 ; U10.10 2675.1,2393.03 ; U7.9 2675.1,2676.5 ; U7.10 2675.1,2676.5 ; U5.7 v1(2635,2910.75) 2594.08,2910.75 2580,2924.83 ; U5.9 2675.1,2959.96 ; U5.10 2675.1,2959.96 ; U5.12 v1(2635,3009.17) 2594.17,3009.17 2580,2995 2580,2959.91 ; v1(2720.47,1412.68) U9.5 ; v1(2720.47,1696.14) U8.5 ; v1(2720.47,1979.61) U6.5 ; v1(2720.47,2263.07) U10.5 ; v1(2720.47,2546.54) U7.5 ; U5.5 v1(2720.47,2830) ; v1(2759.84,1412.68) U9.3 ; v1(2759.84,1696.14) U8.3 ; v1(2759.84,1979.61) U6.3 ; v1(2759.84,2263.07) U10.3 ; v1(2759.84,2546.54) U7.3 ; U5.3 v1(2759.84,2830) v1(2720.47,2830) ; U9.23 2871.06,1513.11 2898.96,1541.01 2951.19,1541.01 2972.28,1519.92 2974.25,1519.92 2985,1509.17 C33.2 ; U8.23 2871.57,1796.57 2900,1825 2952.46,1825 2974.07,1803.39 2974.25,1803.39 2985,1792.64 C31.2 ; U6.23 2870.04,2080.04 2900,2110 2951.1,2110 2985,2076.1 C29.2 ; U10.23 2871.26,2363.5 2899.37,2391.61 2952.96,2391.61 2985,2359.57 C27.2 ; U7.23 2872.8,2646.97 2902.76,2676.93 2951.26,2676.93 2974.25,2653.93 2974.25,2651.81 C25.2 ; U5.23 2857.13,2930.43 2879.52,2908.05 2879.52,2885.94 2895.46,2870 2966.92,2870 2985,2888.08 C23.2 ; 2580,2924.83 2580,2855 2605,2830 v1(2720.47,2830) ; 2580,2924.83 2580,2959.91 ; 2580,2959.91 2580.05,2959.96 v1(2635,2959.96) 2675.1,2959.96
  Bottom Layer w15.75: D52.3 D52.1 2584.21,1215.79 2695,1105 2695,1040 2630,975 2630,960.93 ; C36.2 2630,960.93 ; 2970,835 2666.23,835 2630,871.23 2630,935 2630,960.93 ; C33.2 v1(3010,1507.2) ; C31.2 v1(3010,1790.67) ; C29.2 v1(3010,2074.13) ; C27.2 v1(3010,2357.6) ; C25.2 v1(3010,2641.06) ; C23.2 v1(3010,2924.53)
  Bottom Layer w23.62: C38.1 2906.43,907.29 2957.31,907.29 2975,889.6 2975,835 2975,685
  Bottom Layer w62.99: J2.1 J2.2
  other v1: 2635,1493.43 2635,1591.85 2635,1776.89 2635,1875.31 2635,2060.35 2635,2158.78 2635,2343.82 2635,2442.24 2635,2627.28 2635,2725.71
+3.3: C1.2 C4.1 C7.2 C10.2 C16.2 D57.1 D57.3 J1.4 L1.2 R2.1 R4.2 R15.2 R16.2 R17.2 R18.2 R19.2 R20.2 R21.2 R22.2 R23.2 R24.2 R25.1 R36.2 U1.4 U1.5 U2.1 U3.4 | length 1234.1
  Bottom Layer w13.78: U2.1 2292.06,1226.77 2292.06,1309.07 C7.2
  Bottom Layer w15.75: R25.1 2135,960 2150,945 2230,945 ; R4.2 2228.51,943.51 2230,945 ; R2.1 2300,955 2290,945 2230,945 ; R24.2 2915,1446.49 R36.2 ; R23.2 2915,1728.99 R18.2 ; R22.2 2915,2011.49 R17.2 ; R21.2 2915,2293.99 R16.2 ; R20.2 2915,2576.49 R15.2 ; v1@2915,2895.21 2915,2919.54 R19.2
  Bottom Layer w23.62: C10.2 1929.86,900 1933.79,903.94 1933.79,1013.84 L1.2 ; C4.1 1945,747.5 1945,815 1975,845 2199.87,845 2222.56,822.31 C1.2@2222.56,801.9 ; C1.2@2220.05,792.38 C1.2
  other v1: 2915,1480.45 2915,1763.29 2915,2046.13 2915,2328.96 2915,2611.8 2915,2894.64
+5: C2.2 C3.1 C37.2 C39.1 L2.2 R26.2 U1.1 U1.2 | length 515.8
  Bottom Layer w23.62: C2.2 C37.2 2433.06,548.51 R26.2 2636.49,548.51 2678.46,506.54 L2.2
DAC_CS: D55.3 J2.10 R4.1 U2.3 | length 1587.1
  Mid-Layer 2 w11.81: v1(2825,1215.79) 2859.21,1250 3078.32,1250 3108.92,1219.4 3108.92,1041.87 J2.10
  Mid-Layer 2 w13.78: v1(2340,1175.59) 2380.2,1215.79 v1(2825,1215.79)
  Bottom Layer w13.78: R4.1 2325.22,900 2339.49,914.27 2339.49,1015.92 2320.42,1035 2269.4,1035 2229.28,1075.12 2229.28,1154.28 2250.59,1175.59 U2.3 v1(2340,1175.59)
  Bottom Layer w15.75: v1(2825,1215.79) D55.3
DAC_DRV_EXT: R10.1 TP2.1 U2.10
DAC_DRV_INT: R5.1 TP1.1 U2.14 | length 72.5
  Bottom Layer w15.75: R5.1 TP1.1
GND: C3.2 C4.2 C5.1 C6.1 C8.1 C11.1 C12.1 C13.1 C15.1 C17.1 C18.1 C20.1 C24.1 C26.1 C28.1 C30.1 C32.1 C34.1 C38.2 C39.2 C40.1 C41.1 D49.2 D50.2 D51.2 D52.2 D53.2 D54.2 D55.2 D56.2 D57.2 D58.1 J1.2 J2.13 J2.14 R9.1 R14.1 R27.1 U1.3 U1.6 U2.12 U3.13 U5.1 U5.18 U6.1 U6.18 U7.1 U7.18 U8.1 U8.18 U9.1 U9.18 U10.1 U10.18 U11.6 U11.9
I_LD_EXT: J1.3 Q2.3
I_LD_INT: D1.1 D2.1 D3.1 D4.1 D5.1 D6.1 D7.1 D8.1 D9.1 D10.1 D11.1 D12.1 D13.1 D14.1 D15.1 D16.1 D17.1 D18.1 D19.1 D20.1 D21.1 D22.1 D23.1 D24.1 D25.1 D26.1 D27.1 D28.1 D29.1 D30.1 D31.1 D32.1 D34.1 D35.1 D38.1 D40.1 LD1.3 LD2.3 LD3.3 LD4.3 LD5.3 LD6.3 LD7.3 LD8.3 LD9.3 LD10.3 LD11.3 LD12.3 LD13.3 LD14.3 LD15.3 LD16.3 LD17.3 LD18.3 LD19.3 LD20.3 LD21.3 LD22.3 LD23.3 LD24.3 LD25.3 LD26.3 LD27.3 LD28.3 LD29.3 LD30.3 LD31.3 LD32.3 LD33.3 LD34.3 LD35.3 LD36.3 Q1.3 TP13.1 | length 5338.1
  Bottom Layer w15.75: LD36.3 595.13,1592.64 618.58,1616.1 D40.1 ; LD30.3 595.13,1876.1 618.58,1899.56 D28.1 ; LD24.3 595.13,2159.57 618.58,2183.02 D23.1 ; LD18.3 595.13,2443.03 618.58,2466.49 D19.1 ; LD12.3 595.13,2726.5 618.58,2749.95 D16.1 ; LD6.3 595.13,3009.96 618.58,3033.42 D3.1 ; LD35.3 962.61,1592.64 986.06,1616.1 D38.1 ; LD29.3 962.61,1876.1 986.06,1899.56 D25.1 ; LD23.3 962.61,2159.57 986.06,2183.02 D21.1 ; LD17.3 962.61,2443.03 986.06,2466.49 D18.1 ; LD11.3 962.61,2726.5 986.06,2749.95 D14.1 ; LD5.3 962.61,3009.96 986.06,3033.42 D5.1 ; LD34.3 1330.09,1592.64 1353.54,1616.1 D35.1 ; LD28.3 1330.09,1876.1 1353.54,1899.56 D32.1 ; LD22.3 1330.09,2159.57 1353.54,2183.02 D20.1 ; LD16.3 1330.09,2443.03 1353.54,2466.49 D15.1 ; LD10.3 1330.09,2726.5 1353.54,2749.95 D12.1 ; LD4.3 1330.09,3009.96 1353.54,3033.42 D8.1 ; LD33.3 1697.57,1592.64 1721.02,1616.1 D34.1 ; LD27.3 1697.57,1876.1 1721.02,1899.56 D30.1 ; LD21.3 1697.57,2159.57 1721.02,2183.02 D17.1 ; LD15.3 1697.57,2443.03 1721.02,2466.49 D13.1 ; LD9.3 1697.57,2726.5 1721.02,2749.95 D10.1 ; LD3.3 1697.57,3009.96 1721.02,3033.42 D6.1 ; LD32.3 2065.05,1592.64 2088.5,1616.1 D31.1 ; LD26.3 2065.05,1876.1 2088.5,1899.56 D27.1 ; LD20.3 2065.05,2159.57 2088.5,2183.02 D24.1 ; LD14.3 2065.05,2443.03 2088.5,2466.49 D11.1 ; LD8.3 2065.05,2726.5 2088.5,2749.95 D7.1 ; LD2.3 2065.05,3009.96 2088.5,3033.42 D4.1 ; LD31.3 2432.53,1592.64 2455.98,1616.1 D29.1 ; LD25.3 2432.53,1876.1 2455.98,1899.56 D26.1 ; LD19.3 2432.53,2159.57 2455.98,2183.02 D22.1 ; LD13.3 2432.53,2443.03 2455.98,2466.49 D9.1 ; LD7.3 2432.53,2726.5 2455.98,2749.95 D2.1 ; LD1.3 2432.53,3009.96 2455.98,3033.42 D1.1 TP13.1
I_MO_EXT: C20.2 J2.7 R13.2 TP12.1
I_MO_INT: C15.2 J2.6 R8.2 TP11.1 | length 540.3
  Bottom Layer w15.75: TP11.1 1365,314.35 1365,550 ; R8.2 1383.51,658.51 1365,640 1365,550 ; C15.2 1365,550
LATCH: D55.1 J2.9 R25.2 U2.8 | length 414.3
  Top Layer w15.75: v1(2985,1215.79) 3014.21,1245 3080,1245 3109.22,1215.78 3109.22,1141.57 J2.9
  Bottom Layer w13.78: R25.2 2063.51,1031.93 2068.78,1037.2 U2.8
  Bottom Layer w15.75: D55.1 v1(2985,1215.79)
MISO_LD: D51.3 D54.3 J1.7 J2.4 TP5.1 | length 2722.3
  Top Layer w15.75: J2.4 3108.02,943.3 3183.3,943.3 3210,970 3210,1245 3175.79,1279.21 v1(3175.79,1920)
  Mid-Layer 2 w15.75: v1(2765,1090) 2765,950 2821.97,893.03 J2.4
  Bottom Layer w11.81: D51.3 3178.39,1880 3205,1880 3215,1890 3215,2425 3140,2500 3140,2655 3150,2665 J1.7
  Bottom Layer w15.75: D51.3 v1(3175.79,1920)
  Bottom Layer w19.68: D54.3 2659.53,1207.91 2659.53,1190.87 2760.4,1090 v1(2765,1090)
MOSI_LD: D50.1 D54.1 J1.6 J2.5 TP6.1 U2.5 U5.24 | length 3220.7
  Mid-Layer 2 w15.75: v1(2335.59,1124.41) 2386.18,1175 v1(2726.46,1175)
  Bottom Layer w10: U5.24 2847.99,2910.75 2859.23,2899.51 2859.23,2869.62 2883.85,2845 TP6.1
  Bottom Layer w13.78: U2.5 v1(2335.59,1124.41)
  Bottom Layer w15.75: D54.1 2726.46,1216.77 2736.3,1226.61 2737.28,1226.61 2775.67,1265 3105,1265 ; TP6.1 3108.42,2791.58 3108.42,2714.21 ; J2.5 3108.42,1043.7 3108.42,1970 ; D50.1 3175.05,1970 3108.42,1970 ; J1.6 3108.42,2714.21 ; 3108.42,1970 3108.42,2714.21
  Bottom Layer w19.68: v1(2726.46,1175) D54.1
NetC1_1: C1.1 C5.2 | length 105
  Bottom Layer w23.62: C1.1 C5.2
NetC2_1: C2.1 C6.2 | length 101.1
  Bottom Layer w23.62: C6.2@2225.94,620.43 C2.1
NetC7_1: C7.1 C8.2 | length 75.4
  Bottom Layer w13.78: C8.2 C7.1
NetC9_1: C9.1 C11.2 | length 104.9
  Bottom Layer w13.78: C9.1 C11.2
NetC10_1: C10.1 C12.2 | length 84.6
  Bottom Layer w23.62: C10.1 C12.2
NetC13_2: C13.2 R5.2 U3.3 | length 338.3
  Bottom Layer w15.75: C13.2 1601.51,355.53 1601.51,454.48 R5.2 1601.21,455.24 1601.21,489.64 1637.24,525.67 1637.24,592.24 1657.5,612.5 U3.3
NetC14_1: C14.1 R7.1 U3.2 | length 290.5
  Bottom Layer w15.75: R7.1 1735,550 1787.53,497.47 1807.13,497.47 C14.1 ; R7.1@1673.01,550.53 1673.01,588.01 1682.5,597.5 U3.2
NetC14_2: C14.2 R6.1 U3.1 | length 423.4
  Bottom Layer w15.75: U3.1 1735.5,669.5 1755,650 1755,585 1779.57,560.43 C14.2 1849.57,560.43 1865,545 1865,424.82 1850.18,410 R6.1
NetC16_1: C16.1 C17.2 | length 84.1
  Bottom Layer w15.75: C16.1 C17.2
NetC18_2: C18.2 R10.2 U3.12
NetC19_1: C19.1 R12.1 U3.11
NetC19_2: C19.2 R11.1 U3.10 | length 251
  Bottom Layer w15.75: R11.1 1425,800 1445,780 1540,780 1557.5,797.5 U3.10
NetC23_1: C23.1 C24.2 | length 70
  Bottom Layer w23.62: C23.1 C24.2
NetC25_1: C25.1 C26.2 | length 70
  Bottom Layer w23.62: C25.1 C26.2
NetC27_1: C27.1 C28.2 | length 70
  Bottom Layer w23.62: C27.1 C28.2
NetC29_1: C29.1 C30.2 | length 70
  Bottom Layer w23.62: C29.1 C30.2
NetC31_1: C31.1 C32.2 | length 70
  Bottom Layer w23.62: C31.1 C32.2
NetC33_1: C33.1 C34.2 | length 70
  Bottom Layer w23.62: C33.1 C34.2
NetC35_1: C35.1 D58.2 L2.1 U11.8 | length 344.1
  Bottom Layer w23.62: C35.1 2892.95,550 2897.95,555
  Bottom Layer w39.37: L2.1 2897.95,362.95 2897.95,555 U11.8@2897.95,625
NetC35_2: C35.2 U11.1 | length 147
  Bottom Layer w23.62: U11.1 2675.51,573.61 2699.12,550 C35.2
NetC36_1: C36.1 C40.2 | length 113
  Bottom Layer w23.62: C40.2 C36.1
NetC37_1: C37.1 C41.2 | length 99.1
  Bottom Layer w23.62: C37.1 C41.2
NetD1_2: D1.2 LD1.1 TP14.1 U5.2 | length 791.4
  Top Layer w10: LD1.1 2341.61,2909.37 2365.98,2885 2744.53,2885 v1(2779.53,2850)
  Bottom Layer w10: v1(2779.53,2850) U5.2
  Bottom Layer w15.75: TP14.1 D1.2 2327.24,2975.09 2341.61,2960.72 LD1.1
NetD2_2: D2.2 LD7.1 U7.2 | length 699.2
  Top Layer w10: LD7.1 2341.61,2625.9 2365.98,2601.54 2744.53,2601.54 v1(2779.53,2566.54)
  Bottom Layer w10: v1(2779.53,2566.54) U7.2
  Bottom Layer w15.75: D2.2 2327.24,2691.63 2341.61,2677.26 LD7.1
NetD3_2: D3.2 LD6.1 U5.13 | length 2497.1
  Top Layer w11.81: LD6.1 504.21,3044.21 550,3090 2685.79,3090 v1(2700.79,3075)
  Bottom Layer w10: U5.13 v1(2700.79,3075)
  Bottom Layer w15.75: D3.2 489.84,2975.09 504.21,2960.72 LD6.1
NetD4_2: D4.2 LD2.1 U5.4 | length 1035.2
  Top Layer w10: LD2.1 1974.13,2895.87 2000.91,2869.09 2721.06,2869.09 v1(2740.16,2850)
  Bottom Layer w10: v1(2740.16,2850) U5.4
  Bottom Layer w15.75: D4.2 1959.76,2975.09 1974.13,2960.72 LD2.1
NetD5_2: D5.2 LD5.1 U5.11 | length 2069.5
  Top Layer w11.81: LD5.1 871.69,3021.69 920,3070 2524.49,3070 v1(2605,2989.49)
  Bottom Layer w10: v1(2605,2989.49) U5.11
  Bottom Layer w15.75: D5.2 857.32,2975.09 871.69,2960.72 LD5.1
NetD6_2: D6.2 LD3.1 U5.6 | length 1370.6
  Top Layer w10: LD3.1 1606.65,2883.35 1640,2850 v1(2700.79,2850)
  Bottom Layer w10: v1(2700.79,2850) U5.6
  Bottom Layer w15.75: D6.2 1592.28,2975.09 1606.65,2960.72 LD3.1
NetD7_2: D7.2 LD8.1 U7.4 | length 1035.2
  Top Layer w10: LD8.1 1974.13,2612.4 2000.91,2585.63 2721.06,2585.63 v1(2740.16,2566.54)
  Bottom Layer w10: v1(2740.16,2566.54) U7.4
  Bottom Layer w15.75: D7.2 1959.76,2691.63 1974.13,2677.26 LD8.1
NetD8_2: D8.2 LD4.1 U5.8 | length 1705.5
  Top Layer w11.81: LD4.1 1239.17,3014.17 1275,3050 2485.43,3050 v1(2605,2930.43)
  Bottom Layer w10: v1(2605,2930.43) U5.8
  Bottom Layer w15.75: D8.2 1224.8,2975.09 1239.17,2960.72 LD4.1
NetD9_2: D9.2 LD13.1 U10.2 | length 699.2
  Top Layer w10: LD13.1 2341.61,2342.44 2365.98,2318.07 2744.53,2318.07 v1(2779.53,2283.07)
  Bottom Layer w10: v1(2779.53,2283.07) U10.2
  Bottom Layer w15.75: D9.2 2327.24,2408.16 2341.61,2393.79 LD13.1
NetD10_2: D10.2 LD9.1 U7.6 | length 1370.6
  Top Layer w10: LD9.1 1606.65,2599.88 1640,2566.54 v1(2700.79,2566.54)
  Bottom Layer w10: v1(2700.79,2566.54) U7.6
  Bottom Layer w15.75: D10.2 1592.28,2691.63 1606.65,2677.26 LD9.1
NetD11_2: D11.2 LD14.1 U10.4 | length 1035.2
  Top Layer w10: LD14.1 1974.13,2328.94 2000.91,2302.17 2721.06,2302.17 v1(2740.16,2283.07)
  Bottom Layer w10: v1(2740.16,2283.07) U10.4
  Bottom Layer w15.75: D11.2 1959.76,2408.16 1974.13,2393.79 LD14.1
NetD12_2: D12.2 LD10.1 U7.8 | length 1705.5
  Top Layer w11.81: LD10.1 1239.17,2730.71 1275,2766.54 2485.43,2766.54 v1(2605,2646.97)
  Bottom Layer w10: v1(2605,2646.97) U7.8
  Bottom Layer w15.75: D12.2 1224.8,2691.63 1239.17,2677.26 LD10.1
NetD13_2: D13.2 LD15.1 U10.6 | length 1370.6
  Top Layer w10: LD15.1 1606.65,2316.42 1640,2283.07 v1(2700.79,2283.07)
  Bottom Layer w10: v1(2700.79,2283.07) U10.6
  Bottom Layer w15.75: D13.2 1592.28,2408.16 1606.65,2393.79 LD15.1
NetD14_2: D14.2 LD11.1 U7.11 | length 2069.5
  Top Layer w11.81: LD11.1 871.69,2738.23 920,2786.54 2524.49,2786.54 v1(2605,2706.02)
  Bottom Layer w10: v1(2605,2706.02) U7.11
  Bottom Layer w15.75: D14.2 857.32,2691.63 871.69,2677.26 LD11.1
NetD15_2: D15.2 LD16.1 U10.8 | length 1705.5
  Top Layer w11.81: LD16.1 1239.17,2447.24 1275,2483.07 2485.43,2483.07 v1(2605,2363.5)
  Bottom Layer w10: v1(2605,2363.5) U10.8
  Bottom Layer w15.75: D15.2 1224.8,2408.16 1239.17,2393.79 LD16.1
NetD16_2: D16.2 LD12.1 U7.13 | length 2497.1
  Top Layer w11.81: LD12.1 504.21,2760.75 550,2806.54 2685.79,2806.54 v1(2700.79,2791.54)
  Bottom Layer w10: U7.13 v1(2700.79,2791.54)
  Bottom Layer w15.75: D16.2 489.84,2691.63 504.21,2677.26 LD12.1
NetD17_2: D17.2 LD21.1 U6.6 | length 1370.6
  Top Layer w10: LD21.1 1606.65,2032.95 1640,1999.61 v1(2700.79,1999.61)
  Bottom Layer w10: v1(2700.79,1999.61) U6.6
  Bottom Layer w15.75: D17.2 1592.28,2124.7 1606.65,2110.33 LD21.1
NetD18_2: D18.2 LD17.1 U10.11 | length 2069.5
  Top Layer w11.81: LD17.1 871.69,2454.76 920,2503.07 2524.49,2503.07 v1(2605,2422.56)
  Bottom Layer w10: v1(2605,2422.56) U10.11
  Bottom Layer w15.75: D18.2 857.32,2408.16 871.69,2393.79 LD17.1
NetD19_2: D19.2 LD18.1 U10.13 | length 2497.1
  Top Layer w11.81: LD18.1 504.21,2477.28 550,2523.07 2685.79,2523.07 v1(2700.79,2508.07)
  Bottom Layer w10: U10.13 v1(2700.79,2508.07)
  Bottom Layer w15.75: D19.2 489.84,2408.16 504.21,2393.79 LD18.1
NetD20_2: D20.2 LD22.1 U6.8 | length 1705.5
  Top Layer w11.81: LD22.1 1239.17,2163.78 1275,2199.61 2485.43,2199.61 v1(2605,2080.04)
  Bottom Layer w10: v1(2605,2080.04) U6.8
  Bottom Layer w15.75: D20.2 1224.8,2124.7 1239.17,2110.33 LD22.1
NetD21_2: D21.2 LD23.1 U6.11 | length 2069.5
  Top Layer w11.81: LD23.1 871.69,2171.3 920,2219.61 2524.49,2219.61 v1(2605,2139.09)
  Bottom Layer w10: v1(2605,2139.09) U6.11
  Bottom Layer w15.75: D21.2 857.32,2124.7 871.69,2110.33 LD23.1
NetD22_2: D22.2 LD19.1 U6.2 | length 699.2
  Top Layer w10: LD19.1 2341.61,2058.97 2365.98,2034.61 2744.53,2034.61 v1(2779.53,1999.61)
  Bottom Layer w10: v1(2779.53,1999.61) U6.2
  Bottom Layer w15.75: D22.2 2327.24,2124.7 2341.61,2110.33 LD19.1
NetD23_2: D23.2 LD24.1 U6.13 | length 2497.1
  Top Layer w11.81: LD24.1 504.21,2193.82 550,2239.61 2685.79,2239.61 v1(2700.79,2224.61)
  Bottom Layer w10: U6.13 v1(2700.79,2224.61)
  Bottom Layer w15.75: D23.2 489.84,2124.7 504.21,2110.33 LD24.1
NetD24_2: D24.2 LD20.1 U6.4 | length 1035.2
  Top Layer w10: LD20.1 1974.13,2045.47 2000.91,2018.7 2721.06,2018.7 v1(2740.16,1999.61)
  Bottom Layer w10: v1(2740.16,1999.61) U6.4
  Bottom Layer w15.75: D24.2 1959.76,2124.7 1974.13,2110.33 LD20.1
NetD25_2: D25.2 LD29.1 U8.11 | length 2069.5
  Top Layer w11.81: LD29.1 871.69,1887.83 920,1936.14 2524.49,1936.14 v1(2605,1855.63)
  Bottom Layer w10: v1(2605,1855.63) U8.11
  Bottom Layer w15.75: D25.2 857.32,1841.23 871.69,1826.86 LD29.1
NetD26_2: D26.2 LD25.1 U8.2 | length 699.2
  Top Layer w10: LD25.1 2341.61,1775.51 2365.98,1751.14 2744.53,1751.14 v1(2779.53,1716.14)
  Bottom Layer w10: v1(2779.53,1716.14) U8.2
  Bottom Layer w15.75: D26.2 2327.24,1841.23 2341.61,1826.86 LD25.1
NetD27_2: D27.2 LD26.1 U8.4 | length 1035.2
  Top Layer w10: LD26.1 1974.13,1762.01 2000.91,1735.24 2721.06,1735.24 v1(2740.16,1716.14)
  Bottom Layer w10: v1(2740.16,1716.14) U8.4
  Bottom Layer w15.75: D27.2 1959.76,1841.23 1974.13,1826.86 LD26.1
NetD28_2: D28.2 LD30.1 U8.13 | length 2497.1
  Top Layer w11.81: LD30.1 504.21,1910.35 550,1956.14 2685.79,1956.14 v1(2700.79,1941.14)
  Bottom Layer w10: U8.13 v1(2700.79,1941.14)
  Bottom Layer w15.75: D28.2 489.84,1841.23 504.21,1826.86 LD30.1
NetD29_2: D29.2 LD31.1 U9.2 | length 699.2
  Top Layer w10: LD31.1 2341.61,1492.05 2365.98,1467.68 2744.53,1467.68 v1(2779.53,1432.68)
  Bottom Layer w10: v1(2779.53,1432.68) U9.2
  Bottom Layer w15.75: D29.2 2327.24,1557.77 2341.61,1543.4 LD31.1
NetD30_2: D30.2 LD27.1 U8.6 | length 1370.6
  Top Layer w10: LD27.1 1606.65,1749.49 1640,1716.14 v1(2700.79,1716.14)
  Bottom Layer w10: v1(2700.79,1716.14) U8.6
  Bottom Layer w15.75: D30.2 1592.28,1841.23 1606.65,1826.86 LD27.1
NetD31_2: D31.2 LD32.1 U9.4 | length 1035.2
  Top Layer w10: LD32.1 1974.13,1478.54 2000.91,1451.77 2721.06,1451.77 v1(2740.16,1432.68)
  Bottom Layer w10: v1(2740.16,1432.68) U9.4
  Bottom Layer w15.75: D31.2 1959.76,1557.77 1974.13,1543.4 LD32.1
NetD32_2: D32.2 LD28.1 U8.8 | length 1705.5
  Top Layer w11.81: LD28.1 1239.17,1880.32 1275,1916.14 2485.43,1916.14 v1(2605,1796.57)
  Bottom Layer w10: v1(2605,1796.57) U8.8
  Bottom Layer w15.75: D32.2 1224.8,1841.23 1239.17,1826.86 LD28.1
NetD34_2: D34.2 LD33.1 U9.6 | length 1370.6
  Top Layer w10: LD33.1 1606.65,1466.02 1640,1432.68 v1(2700.79,1432.68)
  Bottom Layer w10: v1(2700.79,1432.68) U9.6
  Bottom Layer w15.75: D34.2 1592.28,1557.77 1606.65,1543.4 LD33.1
NetD35_2: D35.2 LD34.1 U9.8 | length 1705.5
  Top Layer w11.81: LD34.1 1239.17,1596.85 1275,1632.68 2485.43,1632.68 v1(2605,1513.11)
  Bottom Layer w10: v1(2605,1513.11) U9.8
  Bottom Layer w15.75: D35.2 1224.8,1557.77 1239.17,1543.4 LD34.1
NetD38_2: D38.2 LD35.1 U9.11 | length 2069.5
  Top Layer w11.81: LD35.1 871.69,1604.37 920,1652.68 2524.49,1652.68 v1(2605,1572.17)
  Bottom Layer w10: v1(2605,1572.17) U9.11
  Bottom Layer w15.75: D38.2 857.32,1557.77 871.69,1543.4 LD35.1
NetD40_2: D40.2 LD36.1 U9.13 | length 2497.1
  Top Layer w11.81: LD36.1 504.21,1626.89 550,1672.68 2685.79,1672.68 v1(2700.79,1657.68)
  Bottom Layer w10: U9.13 v1(2700.79,1657.68)
  Bottom Layer w15.75: D40.2 489.84,1557.77 504.21,1543.4 LD36.1
NetQ1_1: Q1.1 R6.2 | length 372.9
  Bottom Layer w15.75: Q1.1 1520.14,417.4 1560,377.54 1560,335 1580,315 1720,315 1743.51,338.51 R6.2
NetQ1_2: Q1.2 R7.2 R9.2 U3.5 | length 700.7
  Bottom Layer w15.75: Q1.2 1477.4,342.6 1475,345 ; R7.2 1565,550 1475,460 1475,345 ; R7.2@1601.51,550.54 1601.51,596.51 1607.5,602.5 U3.5 ; R9.2 1536.15,253.85 1475,315 1475,345
NetQ2_1: Q2.1 R11.2 | length 463.6
  Bottom Layer w15.75: R11.2 1373.51,901.49 1350,925 1350,1220 1371.4,1241.4 Q2.1
NetQ2_2: Q2.2 R12.2 R14.2 U3.14
NetR2_2: R2.2 U2.9 | length 232
  Bottom Layer w13.78: U2.9 2166.18,1098.82 2228.51,1036.49 R2.2
NetR8_1: R8.1 U3.6 U3.7 | length 210.7
  Bottom Layer w15.75: R8.1 1545,730 1557.5,717.5 U3.7 U3.6
NetR13_1: R13.1 U3.15 U3.16
NetR15_1: R15.1 U7.20 | length 92.4
  Bottom Layer w10: U7.20 2877.06,2706.02 2882.57,2711.54 R15.1
NetR16_1: R16.1 U10.20 | length 92.4
  Bottom Layer w10: U10.20 2877.06,2422.56 2882.57,2428.07 R16.1@2914.97,2428.07
NetR17_1: R17.1 U6.20 | length 92.4
  Bottom Layer w10: U6.20 2877.06,2139.09 2882.57,2144.61 R17.1
NetR18_1: R18.1 U8.20 | length 92.4
  Bottom Layer w10: U8.20 2877.06,1855.63 2882.57,1861.14 R18.1
NetR19_1: R19.1 U5.20 | length 92.4
  Bottom Layer w10: U5.20 2877.06,2989.49 2882.57,2995 R19.1
NetR26_1: R26.1 R27.2 U11.4 | length 345.8
  Bottom Layer w23.62: R26.1 2580,620 2594.74,634.74 2594.74,791.49 ; R27.2 2594.74,791.49 ; U11.4 2601.23,785 2594.74,791.49
NetR36_1: R36.1 U9.20 | length 92.4
  Bottom Layer w10: U9.20 2877.06,1572.17 2882.57,1577.68 R36.1@2914.97,1577.68
SCK_LD: D50.3 D53.1 D53.3 J1.5 J2.3 TP4.1 U2.4 U5.22 U6.22 U7.22 U8.22 U9.22 U10.22 | length 4983.1
  Top Layer w10: v1(2852.64,2950.12) 3019.88,2950.12 3035,2935 3035,2785 3056.57,2763.43 v1(3140,2763.43)
  Top Layer w11.81: v1(3140,2044.07) v1(3140,2763.43)
  Top Layer w15.75: v1(2852.64,1532.8) 2852.64,852.36 2911.97,793.03 J2.3
  Mid-Layer 2 w10: v1(2852.64,1532.8) 2830,1555.43 2830,1815 ; v1(2852.64,1816.26) 2831.26,1816.26 2830,1815 ; v1(2852.64,2099.72) 2830.28,2099.72 2830,2100 ; v1(2852.64,2383.19) 2830,2383.19 ; v1(2852.64,2666.65) 2830,2666.65 ; v1(2852.64,2950.12) 2830,2927.48 2830,2666.65 ; 2830,1815 2830,2100 ; 2830,2100 2830,2383.19 ; 2830,2383.19 2830,2666.65
  Mid-Layer 2 w15.75: v1(2620,1090) 2620,890 2716.97,793.03 J2.3
  Bottom Layer w10: U9.22 v1(2852.64,1532.8) ; U8.22 v1(2852.64,1816.26) ; U6.22 v1(2852.64,2099.72) ; U10.22 v1(2852.64,2383.19) ; U7.22 v1(2852.64,2666.65) ; U5.22 v1(2852.64,2950.12)
  Bottom Layer w13.78: U2.4 2380,1150 2425.71,1104.29 D53.3
  Bottom Layer w15.75: D53.3 D53.1 2570.79,1040.79 v1(2620,1090) ; TP4.1@2625,1085 TP4.1@2630,1090 ; v1(3140,2044.07) D50.3
  Bottom Layer w19.68: v1(3140,2763.43) J1.5
SDO_1: R20.1 TP16.1 U5.19 U7.24 | length 1056.7
  Mid-Layer 2 w15.75: v1(3055,2560) v1(3055,3040)
  Bottom Layer w10: U7.24 2857.72,2627.28 2873.29,2611.71 2873.29,2556.71 2890,2540 2975,2540 2985,2550 R20.1 ; U5.19 2869.17,3009.17 2900,3040 v1(3055,3040)
  Bottom Layer w15.75: R20.1 3028.28,2575 3043.28,2560 v1(3055,2560)
SDO_2: R21.1 TP18.1 U7.19 U10.24 | length 1020.3
  Mid-Layer 2 w15.75: v1(2985,2255) v1(2985,2760)
  Bottom Layer w10: U10.24 2857.54,2343.82 2877.62,2323.75 2877.62,2272.7 2895.32,2255 v1(2985,2255) ; U7.19 2865.71,2725.71 2900,2760 v1(2985,2760)
  Bottom Layer w15.75: v1(2985,2255) R21.1 3027.03,2292.5 3043.28,2276.25 TP18.1
SDO_3: R22.1 TP15.1 U6.24 U10.19 | length 996.9
  Mid-Layer 2 w15.75: v1(2950,1965) v1(2950,2475)
  Bottom Layer w10: U6.24 2854.65,2060.35 2870,2045 2870,1985 2890,1965 v1(2950,1965) ; U10.19 2867.24,2442.24 2900,2475 v1(2950,2475)
  Bottom Layer w15.75: v1(2950,1965) 2970,1965 2981.07,1976.07 2981.07,2006.06 R22.1 3025.78,2010 3043.28,1992.5 TP15.1
SDO_4: R23.1 TP17.1 U6.19 U8.24 | length 1058.8
  Mid-Layer 2 w15.75: v1(3055,1708.75) v1(3055,2190)
  Bottom Layer w10: U8.24 2852.64,1776.89 2870,1759.53 2870,1710 2890,1690 2975,1690 2985,1700 R23.1 ; U6.19 2868.78,2158.78 2900,2190 v1(3055,2190)
  Bottom Layer w15.75: R23.1 3024.53,1727.5 3043.28,1708.75 v1(3055,1708.75)
SDO_5: R24.1 TP19.1 U8.19 U9.24 | length 1004.5
  Mid-Layer 2 w15.75: v1(2985,1410) v1(2985,1905)
  Bottom Layer w10: U9.24 2854.77,1493.43 2871.75,1476.45 2871.75,1426.61 2888.36,1410 v1(2985,1410) ; U8.19 2865.31,1875.31 2895,1905 v1(2985,1905)
  Bottom Layer w15.75: v1(2985,1410) R24.1 3023.28,1445 3043.28,1425 TP19.1
SHIELD: H1.1 H2.1 H3.1 H4.1 H5.1 H6.1 H7.1 H8.1 | length 13672.5
  Mid-Layer 2 w19.68: 145.16,3240 ccw(c194.37,3240) 194.37,3190.79 cw(c194.37,3161.26) 223.9,3161.26 223.9,1768.78 ; 145.16,3240.04 145.16,3444.21 cw(c202.24,3444.21) 202.24,3501.3 469.96,3501.3 cw(c469.96,3436.34) 534.92,3436.34 ccw(c580.2,3436.34) 580.2,3391.06 3076.26,3391.06 ccw(c3076.26,3436.34) 3121.53,3436.34 cw(c3186.5,3436.34) 3186.45,3501.3 ; 194.32,1739.21 ccw(c194.37,1690) 145.16,1690 145.16,192.24 ccw(c202.24,192.24) 202.24,135.16 3454.21,135.16 ccw(c3454.21,192.24) 3511.3,192.2 ; 194.37,1739.21 ccw(c194.37,1768.74) 223.9,1768.74 ; 3186.5,3501.3 3454.21,3501.3 cw(c3454.21,3444.21) 3511.3,3444.21 3511.3,3215.87 cw(c3462.09,3215.87) 3462.14,3166.65 cw(c3462.09,3176.5) 3462.09,3166.65 ccw(c3462.09,3137.13) 3432.56,3137.13 3432.56,1798.54 ccw(c3462.09,1798.54) 3462.09,1769.02 cw(c3462.09,1719.8) 3511.3,1719.8 3511.3,192.24
SW_EXT_CS: D51.1 D56.1 J1.8 J2.11 | length 2120.4
  Bottom Layer w11.81: D56.1 2948.71,1039.48 2948.71,1011.29 3016.7,943.3 3107.48,943.3 J2.11 3210,945.28 3210,1680 3237.15,1707.15 3237.15,2442.85 3195,2485 J1.8 ; D51.1 3235,1802.6
SW_INT_CS: D56.3 J2.12 U5.21 U6.21 U7.21 U8.21 U9.21 U10.21 | length 3241.9
  Top Layer w15.75: v1(2875,1552.48) 2875,890 2921.86,843.14 3107.64,843.14 J2.12
  Mid-Layer 2 w10: v1(2875,1552.48) 2895,1572.48 2895,1835 ; v1(2875,1835.94) 2894.06,1835.94 2895,1835 ; v1(2875,2119.41) 2894.41,2119.41 2895,2120 ; v1(2875,2402.87) 2892.13,2402.87 2895,2400 ; v1(2875,2686.34) 2895,2686.34 ; v1(2875,2969.8) 2895,2949.8 2895,2686.34 ; 2895,1835 2895,2120 ; 2895,2120 2895,2400 ; 2895,2400 2895,2686.34
  Bottom Layer w10: U9.21 v1(2875,1552.48) ; U8.21 v1(2875,1835.94) ; U6.21 v1(2875,2119.41) ; U10.21 v1(2875,2402.87) ; U7.21 v1(2875,2686.34) ; U5.21 v1(2875,2969.8)
  Bottom Layer w11.81: D56.3 2872.6,1007.4 2885,995 2930,995 3005,920 3005,863.92 3025.35,843.57 3107.22,843.57 J2.12
VREF_DAC: C9.2 L1.1 TP3.1 U2.11 U2.13 | length 313
  Bottom Layer w13.78: L1.1 1940.57,1083.61 1984.2,1083.61 2000.43,1099.84 2000.43,1150 ; U2.11 2000.43,1150 ; U2.13 2004.25,1201.18 C9.2 2000.43,1150
pads on no net: J1.9 J1.10 J2.8 LD1.2 LD1.4 LD2.2 LD2.4 LD3.2 LD3.4 LD4.2 LD4.4 LD5.2 LD5.4 LD6.2 LD6.4 LD7.2 LD7.4 LD8.2 LD8.4 LD9.2 LD9.4 LD10.2 LD10.4 LD11.2 LD11.4 LD12.2 LD12.4 LD13.2 LD13.4 LD14.2 LD14.4 LD15.2 LD15.4 LD16.2 LD16.4 LD17.2 LD17.4 LD18.2 LD18.4 LD19.2 LD19.4 LD20.2 LD20.4 LD21.2 LD21.4 LD22.2 LD22.4 LD23.2 LD23.4 LD24.2 LD24.4 LD25.2 LD25.4 LD26.2 LD26.4 LD27.2 LD27.4 LD28.2 LD28.4 LD29.2 LD29.4 LD30.2 LD30.4 LD31.2 LD31.4 LD32.2 LD32.4 LD33.2 LD33.4 LD34.2 LD34.4 LD35.2 LD35.4 LD36.2 LD36.4 U2.2 U2.6 U2.7 U3.8 U3.9 U5.14 U5.15 U5.16 U5.17 U5.HTAB U6.14 U6.15 U6.16 U6.17 U6.HTAB U7.14 U7.15 U7.16 U7.17 U7.HTAB U8.14 U8.15 U8.16 U8.17 U8.HTAB U9.14 U9.15 U9.16 U9.17 U9.19 U9.HTAB U10.14 U10.15 U10.16 U10.17 U10.HTAB U11.2 U11.3 U11.5
copper on no net: | length 13909.1
  Mid-Layer 2 w50: 105,3240 cw(c155,3240) 105,3240.1 ; 105,3240 ccw(c194.37,3240) 183.74,3151.26 183.74,1778.74 ccw(c194.37,1690) 105,1690 105,192.24 ccw(c202.24,192.24) 202.24,95 3454.21,95 ccw(c3454.21,192.24) 3551.46,192.1 ; 105,3240 105,3240.1 ; 105,3240.1 105,3444.21 cw(c202.24,3444.21) 202.24,3541.46 469.96,3541.46 cw(c469.96,3436.34) 575.08,3436.34 ccw(c580.2,3436.34) 580.2,3431.22 3076.26,3431.22 ccw(c3076.26,3436.34) 3081.38,3436.34 cw(c3186.5,3436.34) 3186.36,3541.46 ; 3186.36,3541.46 cw(c3186.5,3436.34) 3186.5,3541.46 ; 3186.36,3541.46 cw(c3186.5,3491.46) 3186.5,3541.46 ; 3186.5,3541.46 3454.21,3541.46 cw(c3454.21,3444.21) 3551.46,3444.21 3551.46,3215.87 cw(c3462.09,3215.87) 3472.72,3127.13 3472.72,1808.54 cw(c3462.09,1719.8) 3551.46,1719.8 3551.46,192.24 ; 3551.46,192.1 ccw(c3454.21,192.24) 3551.46,192.24 ; 3551.46,192.1 ccw(c3501.46,192.24) 3551.46,192.24

## Keep-outs
Keep-Out Layer:
  the board outline again, w10

## Other copper
Bottom Layer:
  region: 1830,1275 1780,1275 1780,1260 1830,1260
  region: 1830,1330 1780,1330 1780,1315 1830,1315
  region: 1700,1330 1650,1330 1650,1315 1700,1315
  region: 1700,1275 1650,1275 1650,1260 1700,1260
  region net +3.3: 1905,710 1905,213.42 1991.2,213.42 1991.2,305.69 1945,305.69 1945,715
  region net +5: 2085.03,305.56 2140,305.56 2140,293.97 2260,293.97 2260,220.6 2125.6,220.6 2118.43,213.43 2081.57,213.43 2079.72,215.28
  region net 12V_EXP: 2860,705 2943.68,705 2963.04,724.36 3055,724.36 3055,662.04 2860,662.04
  region net +5: 2242.75,294.25 2609.25,294.25 2620,305 2743.33,305 2743.33,220.65 2316.35,220.65
  region net NetC35_1: 2830,311.9 2830,221.92 3092.22,221.92 3092.22,291.06 3071.38,311.9

## Text inside footprints (layer, text, board x,y; h text height)
U5: Bottom 3D Body "*" at 2792.96,2903.56 h25 r180
U6: Bottom 3D Body "*" at 2792.96,2053.17 h25 r180
U7: Bottom 3D Body "*" at 2792.96,2620.1 h25 r180
U8: Bottom 3D Body "*" at 2792.96,1769.7 h25 r180
U9: Bottom 3D Body "*" at 2792.96,1486.24 h25 r180
U10: Bottom 3D Body "*" at 2792.96,2336.63 h25 r180